# Altium PCB RX_Board.PcbDoc (part 1 of 5)
Units mm, origin at the board's own origin, x right, y up, seen from the top; angles counter-clockwise.
Board outline 69 x 69 mm, 4 copper layers (Top Layer, Int1 (GND), Int2 (GND), Bottom Layer), stack 1.586 mm thick; 118 components, 59 nets, 325 pads, 477 vias.
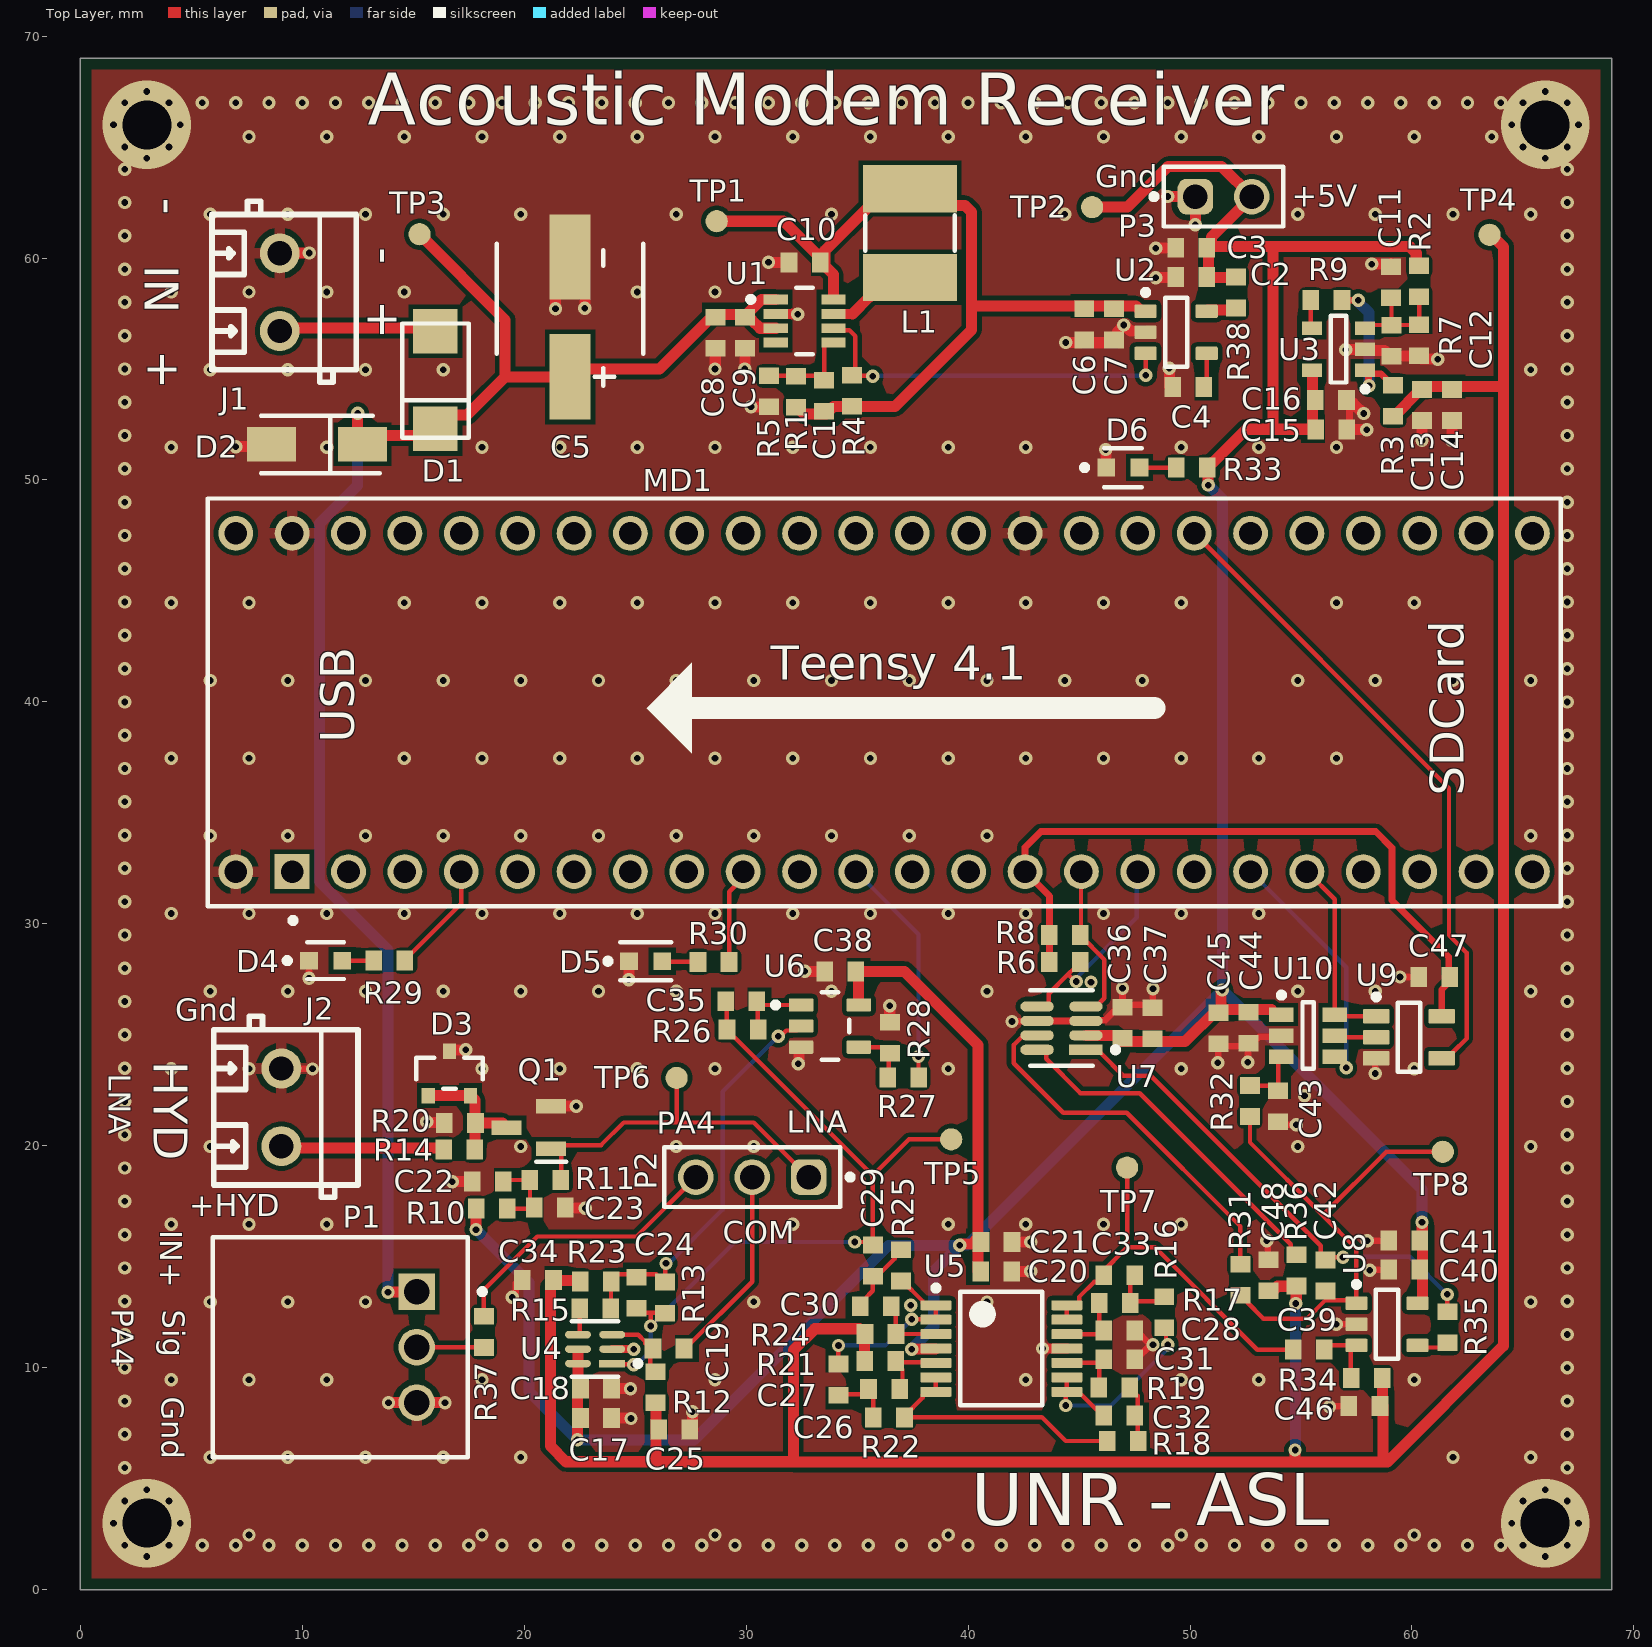
[diagram p0: Top Layer view]
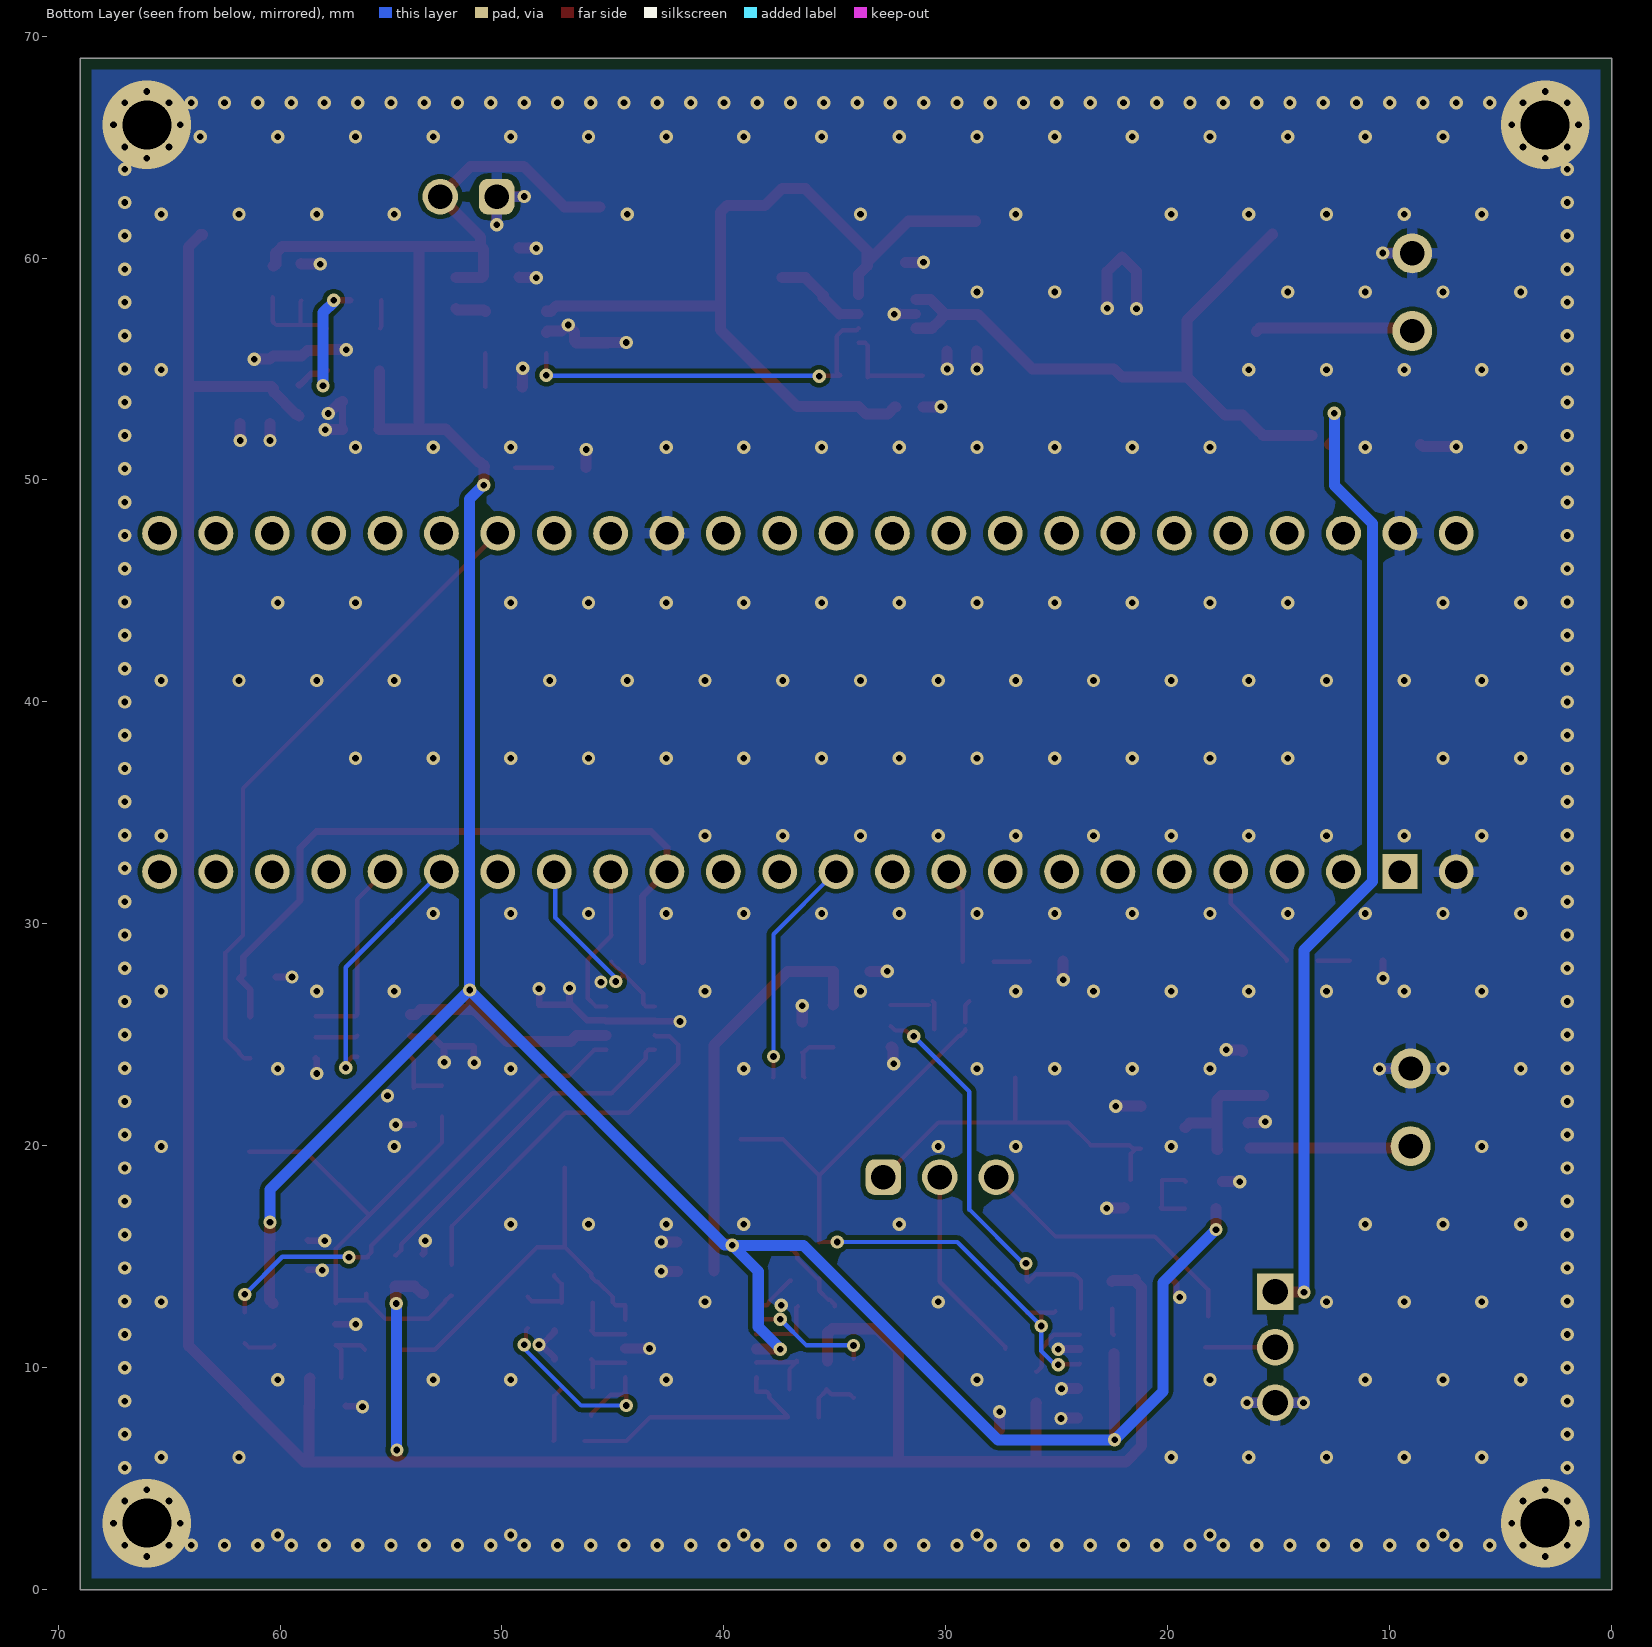
[diagram p1: Bottom Layer view, seen from below]
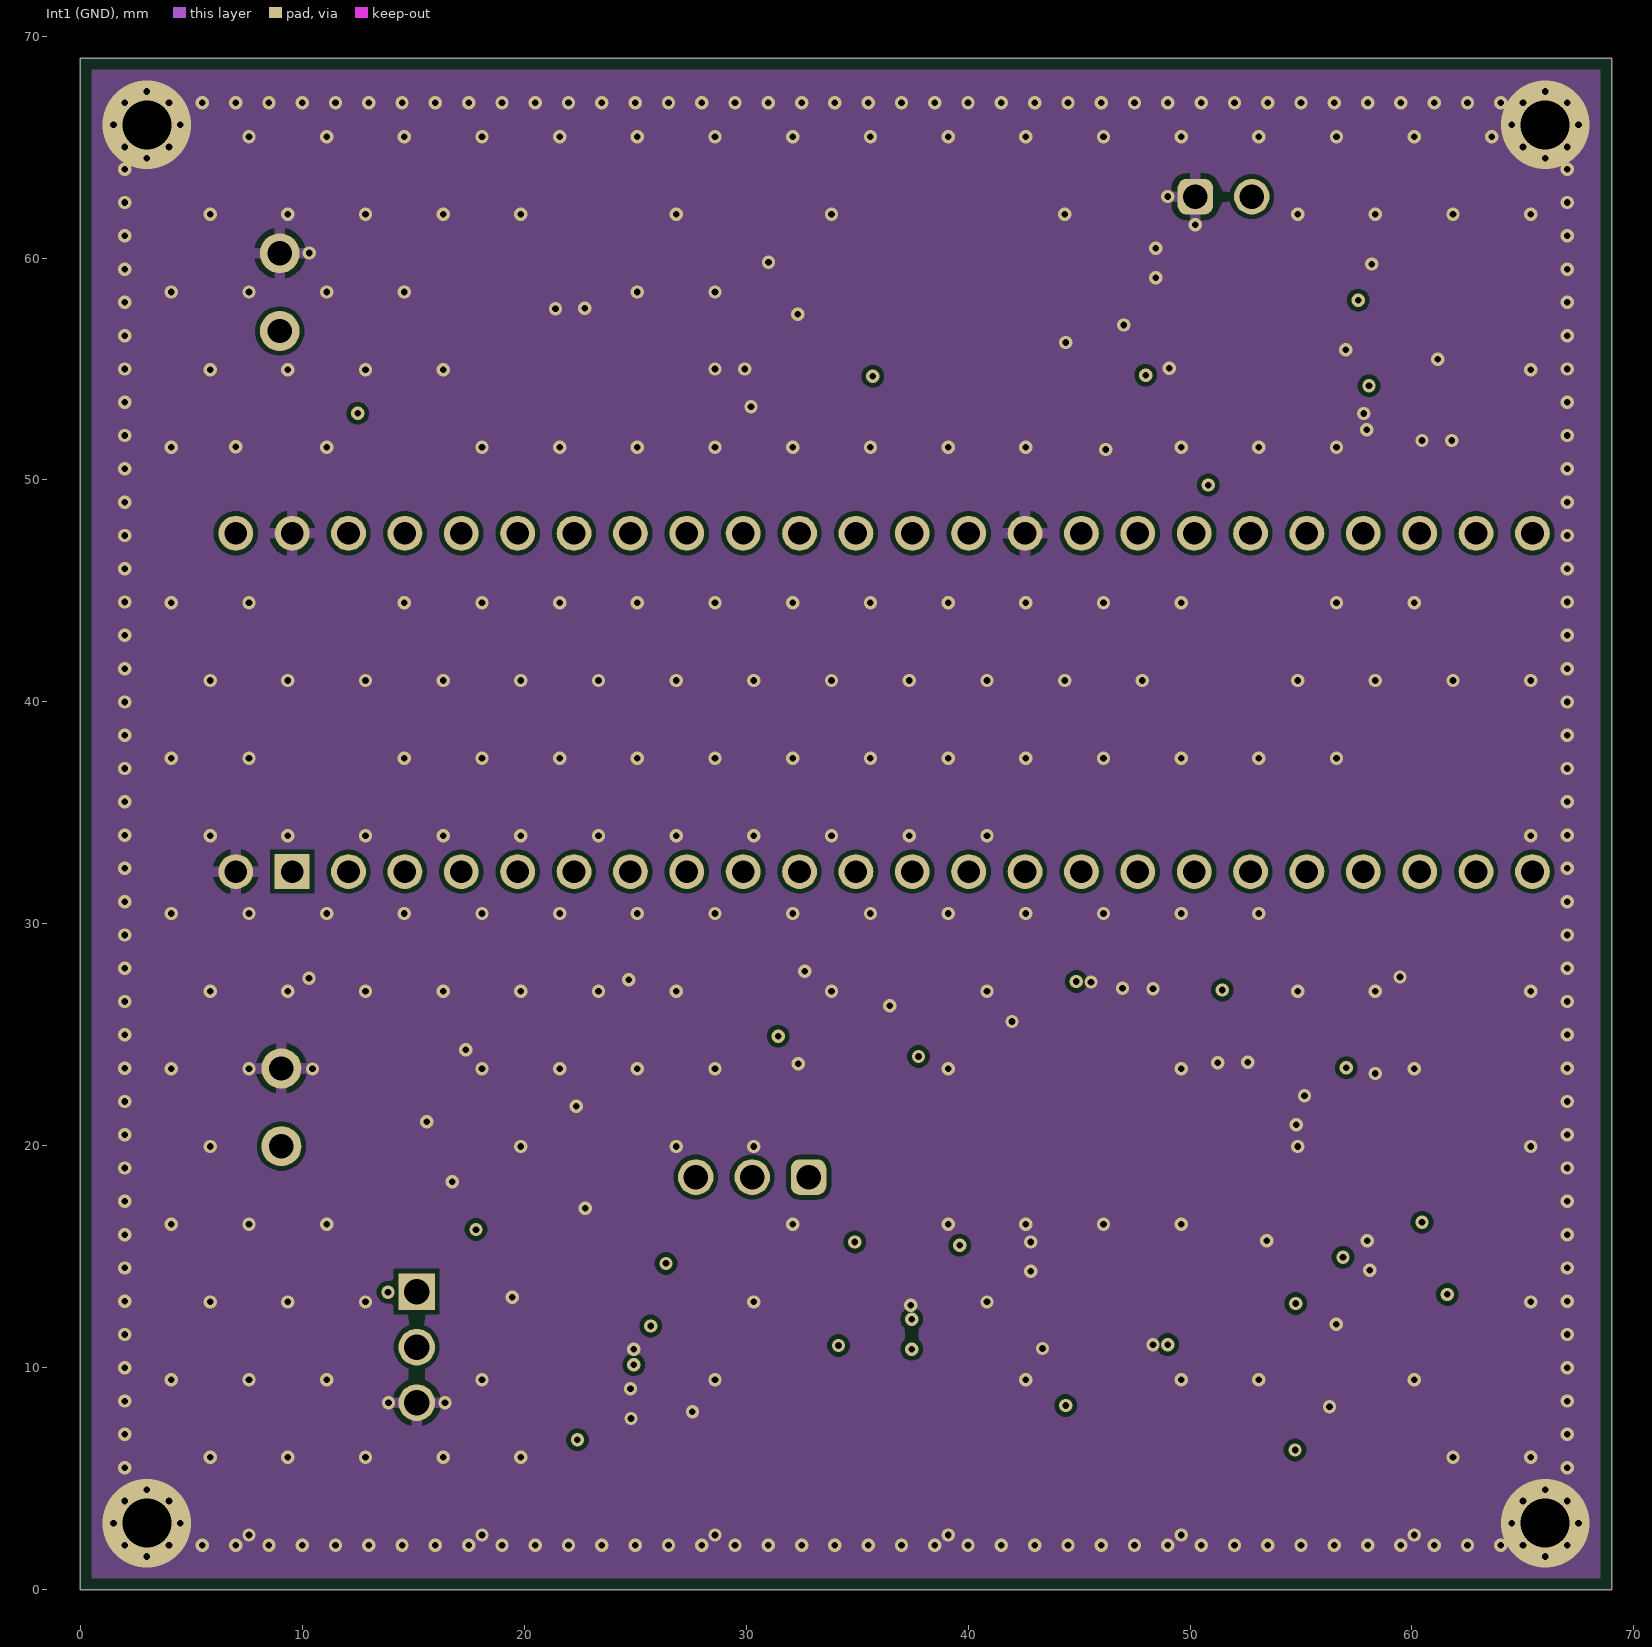
[diagram p2: Int1 (GND)]
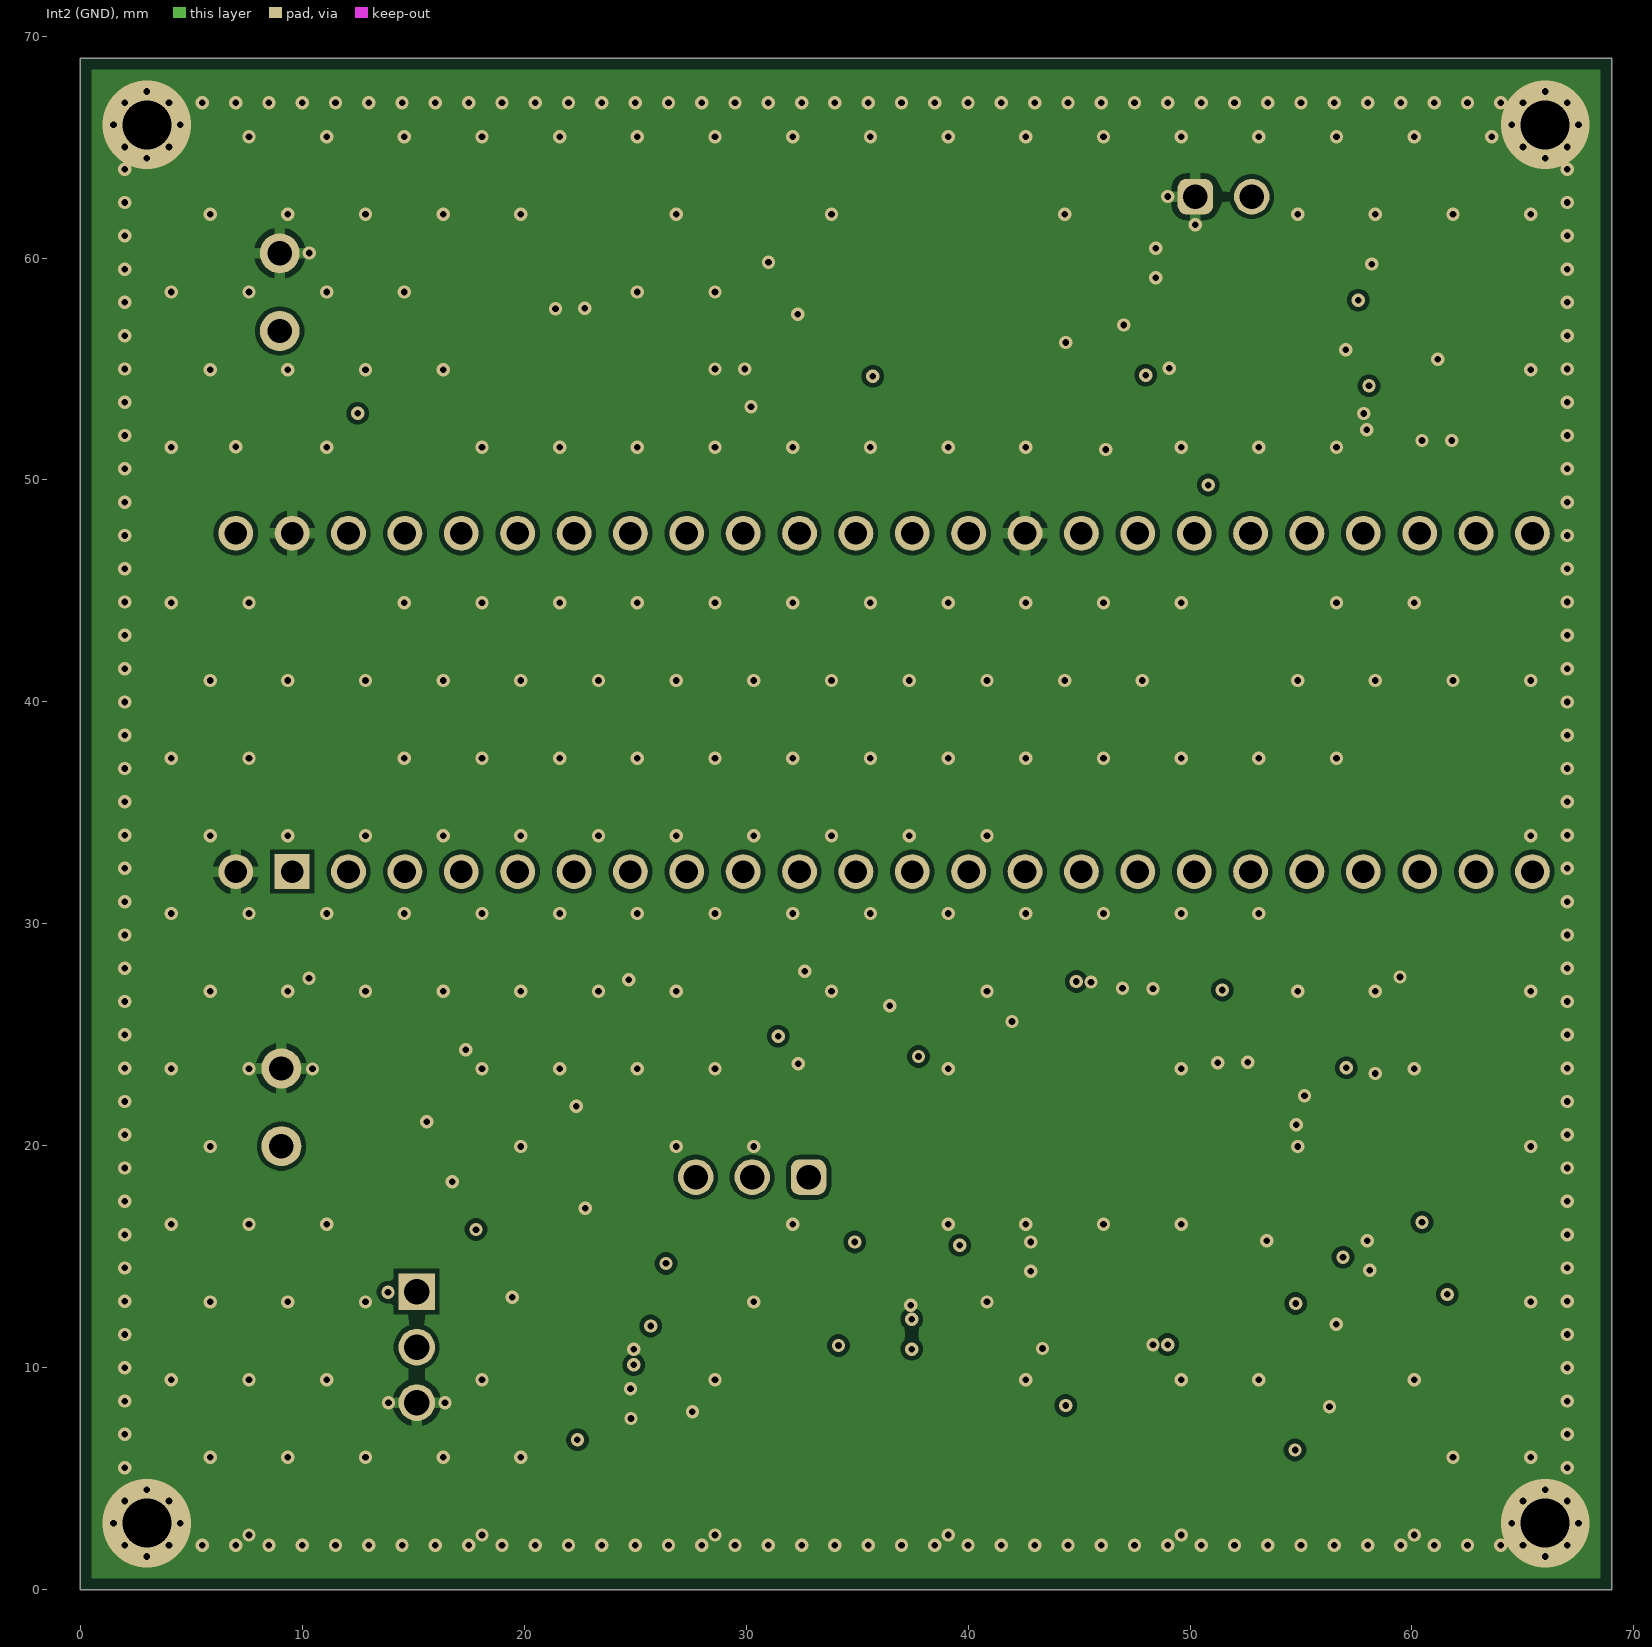
[diagram p3: Int2 (GND)]
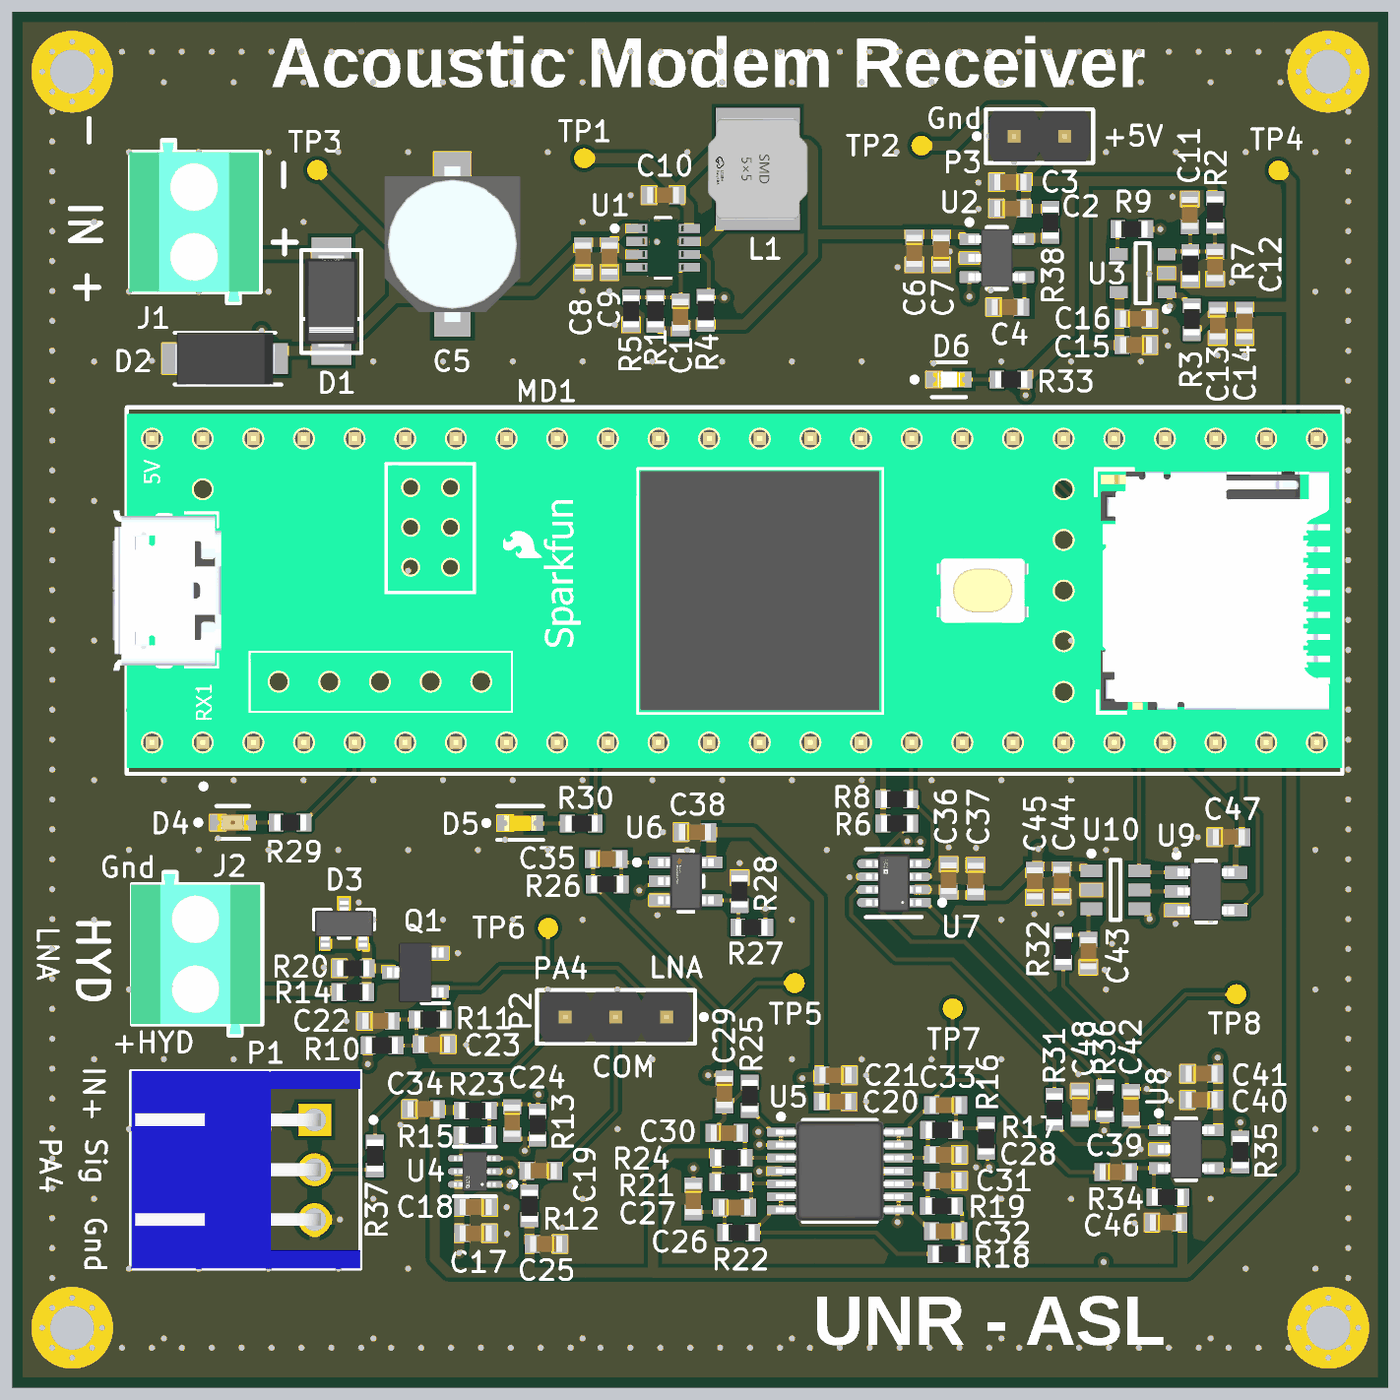
[diagram p5: 3D render of the assembled board from above, using the file's embedded part models]

## Layer stack, top to bottom
Top Solder: solder mask 0.0254, SM-001, Dk 4
Top Layer: signal copper 0.035
Dielectric 1: prepreg 0.2104, PP-017, Dk 4.4
Int1 (GND): signal copper 0.0152
Dielectric 3: core 1.065, Core-039, Dk 4.6
Int2 (GND): signal copper 0.0152
Dielectric 5: prepreg 0.2104, PP-017, Dk 4.4
Bottom Layer: signal copper 0.035
Bottom Solder: solder mask 0.0254, SM-001, Dk 4

## Board outline
0,0 0,69 69,69 69,0

## Design rules (kind name [scope] priority, off if disabled: settings)
BoardOutlineClearance [All] p1: gap=0.5 ignorepadtopadclearanceinfootprint=FALSE
Clearance [All] p1: gap=0.2 ignorepadtopadclearanceinfootprint=FALSE
MinimumSolderMaskSliver [All] p1: minsoldermaskwidth=0.1
PolygonConnect [All] p1: thpad.connectstyle=Relief thpad.reliefconductorwidth=0.5 thpad.reliefentries=4 thpad.polygonreliefangle="90 Angle" thpad.airgapwidth=0.254 smdpad.connectstyle=Direct smdpad.reliefconductorwidth=0.254 smdpad.reliefentries=4 smdpad.polygonreliefangle="90 Angle" smdpad.airgapwidth=0.254 via.connectstyle=Direct via.reliefconductorwidth=0.254 via.reliefentries=4 via.polygonreliefangle="90 Angle" via.airgapwidth=0.254
RoutingVias [All] p1: holewidth=0.3 width=0.6 viastyle="Through Hole" minholewidth=0.3 minwidth=0.6 maxholewidth=0.3 maxwidth=0.6
SilkToSilkClearance [All] p1: silktosilkclearance=0.15
SilkToSolderMaskClearance [IsPad] p1: minsilkscreentomaskgap=0.15 clearancetoexposedcopper=TRUE
SolderMaskExpansion SolderMaskExpansion_Vias [IsVia] p1: expansion=0.102 istentingtop=TRUE
SolderMaskExpansion SolderMaskExpansion_THT [IsPad And IsThruPin] p2: expansion=0.1 istentingtop=FALSE
SolderMaskExpansion [All] p3: expansion=0.05 istentingtop=FALSE
SupplyNets "Schematic Supply Nets_6" [InNet('2V5')] p1: voltage=0.000
SupplyNets "Schematic Supply Nets_5" [InNet('GND')] p2: voltage=0.000
SupplyNets "Schematic Supply Nets_4" [InNet('VIN')] p3: voltage=0.000
SupplyNets "Schematic Supply Nets_3" [InNet('5V')] p4: voltage=0.000
SupplyNets "Schematic Supply Nets_2" [InNet('Teensy_3V3')] p5: voltage=0.000
SupplyNets "Schematic Supply Nets_1" [InNet('5V25')] p6: voltage=0.000
Width Width_PWR_MAIN [InNetClass('PWR_MAIN')] p1: maxlimit=0.8 minlimit=0.5 preferedwidth=0.5
Width Width_PWR_LV [InNetClass('PWR_LV')] p2: maxlimit=0.5 minlimit=0.5 preferedwidth=0.5
Width Width_GND [InNet('GND')] p3: maxlimit=0.8 minlimit=0.5 preferedwidth=0.5
Width [All] p4: maxlimit=0.2 minlimit=0.15 preferedwidth=0.2
27 further rules are at their usual default settings.

## Classes and differential pairs
net class PWR_LV: 2V5 2V5_OUT 5V 5V25 5V_LDO G Teensy_3V3
net class PWR_MAIN: Buck_SW VIN VIN_Supply

## Components (designator, comment, footprint, x,y, rotation, side; value= is the part's Value field where it differs from the comment)
C1 "15pF" CAP_0603 33.517,53.8 r270 top
C2 "100nF" CAP_0603 50.06,59.142 r0 top
C3 "10uF" CAP_0603 50.06,60.463 r180 top value=10µF
C4 "10nF" CAP_0603 49.918,54.189 r0 top
C5 "100uF 25V" CAPAE660X800N 22.069,57.345 r90 top value=100uF
C6 "10uF" CAP_0603 45.234,57.008 r270 top value=10µF
C7 "100nF" CAP_0603 46.58,57.008 r90 top
C8 "10uF" CAP_0603 28.622,56.627 r90 top value=10µF
C9 "100nF" CAP_0603 29.943,56.627 r90 top
C10 "4.7µF" CAP_0603 32.635,59.802 r0 top
C11 "10uF" CAP_0603 59.051,58.913 r270 top value=10µF
C12 "100nF" CAP_0603 60.321,56.297 r270 top
C13 "100nF" CAP_0603 60.448,53.376 r270 top
C14 "10uF" CAP_0603 61.794,53.376 r90 top value=10µF
C15 "10uF" CAP_0603 56.359,52.284 r180 top value=10µF
C16 "100nF" CAP_0603 56.348,53.605 r0 top
C17 "10uF" CAP_0603 23.237,7.743 r180 top value=10µF
C18 "100nF" CAP_0603 23.237,9.064 r180 top
C19 "6.8nF" CAP_0603 26.503,10.867 r180 top
C20 "100nF" CAP_0603 41.271,14.347 r0 top
C21 "10uF" CAP_0603 41.282,15.668 r180 top value=10µF
C22 "10uF" CAP_0603 18.36,18.386 r0 top value=10µF
C23 "100nF" CAP_0603 21.154,17.217 r180 top
C24 "6.8pF" CAP_0603 25.066,13.382 r270 top
C25 "100nF" CAP_0603 26.768,7.21 r180 top
C26 "1nF" CAP_0603 34.159,9.47 r270 top
C27 "1nF" CAP_0603 36.217,9.039 r0 top
C28 "470pF" CAP_0603 46.808,11.68 r180 top
C29 "1nF" CAP_0603 35.709,14.83 r270 top
C30 "1nF" CAP_0603 35.836,12.772 r0 top
C31 "1nF" CAP_0603 46.808,10.385 r180 top
C32 "1.2nF" CAP_0603 46.808,7.845 r180 top
C33 "3.3nF" CAP_0603 46.808,14.169 r180 top
C34 "100nF" CAP_0603 20.621,13.966 r0 top
C35 "68pF" CAP_0603 29.775,26.514 r0 top
C36 "100nF" CAP_0603 46.961,25.549 r270 top
C37 "10uF" CAP_0603 48.307,25.523 r270 top value=10µF
C38 "100nF" CAP_0603 34.235,27.86 r0 top
C39 "6.8nF" CAP_0603 55.343,10.817 r0 top
C40 "100nF" CAP_0603 59.646,14.423 r180 top
C41 "10uF" CAP_0603 59.646,15.744 r0 top value=10µF
C42 "68pF" CAP_0603 56.105,14.159 r270 top
C43 "3.3nF" CAP_0603 53.971,21.789 r90 top
C44 "100nF" CAP_0603 52.625,25.32 r90 top
C45 "1µF" CAP_0603 51.279,25.295 r90 top
C46 "100nF" CAP_0603 57.857,8.277 r0 top
C47 "100nF" CAP_0603 61.007,27.606 r0 top
C48 "100nF" CAP_0603 53.539,14.169 r270 top
D1 "SS34" SS34 16,54.5 r270 top
D2 "SMAJ15A" DIOM5026X229N 10.664,51.605 r180 top
D3 "BAV99,215" FP-SOT23-MFG 16.633,23.263 r90 top
D4 "LTST-C190KRKT" FP-LTST-C190KRKT-MFG 11.057,28.343 r0 top
D5 "LTST-C190KFKT" FP-LTST-C190KFKT-MFG 25.472,28.317 r0 top
D6 "LTST-C190KGKT" FP-LTST-C190KGKT-MFG 46.973,50.557 r0 top
J1 "DB301V-3.5-2P-GN-S" DB301V-3.5-2P-GN-S 8.988,60.21 r270 top
J2 "DB301V-3.5-2P-GN-S" DB301V-3.5-2P-GN-S 9.064,23.486 r270 top
L1 "22µH" SWPA5040S100MT 37.385,61.123 r90 top
MD1 "DEV-16996" FP-DEV-16996-MFG 36.217,39.976 r0 top locked
P1 "S3B-XH-A(LF)(SN)" JST-S3B-XH-A(LF)(SN)_V 15.16,10.929 r270 top
P2 "61300311121" 61300311121 30.273,18.589 r180 top
P3 "61300211121" 61300211121 51.511,62.763 r0 top
Q1 "LSK170A" SOT96P237X122-3N 20.215,20.824 r180 top
R1 "560kΩ" RES_0603 32.254,53.986 r270 top
R2 "10kΩ" RES_0603 60.321,58.939 r90 top
R3 "10Ω" RES_0603 59.153,53.579 r270 top
R4 "100kΩ" RES_0603 34.769,54.011 r90 top
R5 "100kΩ" RES_0603 31.035,53.986 r90 top
R6 "4.7kΩ" RES_0603 44.37,28.292 r180 top
R7 "10kΩ" RES_0603 59.077,56.283 r270 top
R8 "4.7kΩ" RES_0603 44.37,29.511 r180 top
R9 "4.7kΩ" RES_0603 56.13,58.1 r0 top
R10 "22Ω" RES_0603 18.527,17.167 r0 top
R11 "510Ω" RES_0603 20.962,18.462 r180 top
R12 "10kΩ" RES_0603 25.93,9.115 r90 top
R13 "47kΩ" RES_0603 26.336,13.179 r270 top
R14 "100Ω" RES_0603 17.065,19.834 r0 top
R15 "9.1kΩ" RES_0603 23.212,12.671 r180 top
R16 "1.5kΩ" RES_0603 48.84,12.493 r90 top
R17 "1.5kΩ" RES_0603 46.616,12.925 r180 top
R18 "1.5kΩ" RES_0603 46.961,6.702 r0 top
R19 "1.5kΩ" RES_0603 46.605,9.115 r180 top
R20 "100kΩ" RES_0603 17.09,21.027 r0 top
R21 "20kΩ" RES_0603 36.028,10.309 r0 top
R22 "3kΩ" RES_0603 36.42,7.769 r0 top
R23 "820Ω" RES_0603 23.212,13.89 r0 top
R24 "8.2kΩ" RES_0603 36.039,11.528 r0 top
R25 "7.5kΩ" RES_0603 36.979,14.627 r270 top
R26 "5.6kΩ" RES_0603 29.827,25.244 r0 top
R27 "3.3kΩ" RES_0603 37.069,23.085 r0 top
R28 "100kΩ" RES_0603 36.471,24.888 r270 top
R29 "1kΩ" RES_0603 13.941,28.343 r180 top
R30 "1kΩ" RES_0603 28.546,28.292 r180 top
R31 "4.7kΩ" RES_0603 52.269,13.952 r90 top
R32 "100Ω" RES_0603 52.701,22.007 r90 top
R33 "2.4kΩ" RES_0603 50.096,50.557 r180 top
R34 "10kΩ" RES_0603 57.945,9.547 r0 top
R35 "10kΩ" RES_0603 61.591,11.807 r90 top
R36 "82Ω" RES_0603 54.809,14.373 r90 top
R37 "330Ω" RES_0603 18.183,11.629 r270 top
R38 "0Ω" RES_0603 52.066,58.431 r90 top
TP1 "Test Point" "Test Point" 28.673,61.656 r90 top
TP2 "Test Point" "Test Point" 45.589,62.291 r90 top
TP3 "Test Point" "Test Point" 15.287,61.072 r90 top
TP4 "Test Point" "Test Point" 63.496,61.047 r90 top
TP5 "Test Point" "Test Point" 39.239,20.291 r90 top
TP6 "Test Point" "Test Point" 26.869,23.059 r90 top
TP7 "Test Point" "Test Point" 47.164,19.021 r90 top
TP8 "Test Point" "Test Point" 61.388,19.732 r90 top
U1 "TPS62120DCNR" FP-DCN0008A-MFG 32.635,57.161 r0 top
U2 "TPS73150DBVR" DBV0005A_N 49.374,56.653 r0 top
U3 "AD8031ARTZ-REEL7" ADI-RJ-5_L 56.689,55.891 r180 top
U4 "ADA4807-1AKSZ-R2" FP-KS-6-IPC_C 23.194,10.842 r180 top
U5 "OPA4322AIPWR" PW0014A_N 41.5,10.867 r0 top
U6 "TS5A3166DBVR" FP-DBV0005A-MFG 33.778,25.396 r0 top
U7 "AD5245BRJZ10-RL7" FP-RJ-8-IPC_B 44.209,25.303 r180 top
U8 "OPA365AIDBVR" DBV0005A_N 58.873,11.96 r0 top
U9 "SN74LVC1G125DBVR" DBV0005A_M 59.864,24.888 r0 top
U10 "ADC121S101CIMF/NOPB" MF06A_N 55.317,24.964 r0 top

## Footprints (in the part's own frame and the unit in brackets; to place one, negate y for a bottom-side part, rotate by r counter-clockwise, add the part's x,y. Pads: shape width x height; smd on the part's side, far side on the other; paste and mask are expansions set on the pad)
61300211121 [mm] "Pin Header, pitch 2.54 mm, THT, Vertical, single row, 2p"
  rrect50% 1.6x1.6 hole 1.1: 1(-1.27,0)
  round 1.6 hole 1.1: 2(1.27,0)
  silkscreen extent -3.26,-1.35 2.69,1.35, body extent -2.54,-1.27 2.54,1.27, height 8.57
61300311121 [mm] "Pin Header, pitch 2.54 mm, THT, Vertical, single row, 3p"
  rrect50% 1.6x1.6 hole 1.1: 1(-2.54,0)
  round 1.6 hole 1.1: 2(0,0) 3(2.54,0)
  silkscreen extent -4.53,-1.35 3.96,1.35, body extent -3.81,-1.27 3.81,1.27, height 8.57
ADI-RJ-5_L [mm] "SOT-23, 5-Leads, Body 2.9x1.6mm, Pitch 0.95mm, IPC High Density"
  rect 0.9x0.6 smd: 1(-1.2,0.95) 2(-1.2,0) 3(-1.2,-0.95) 4(1.2,-0.95) 5(1.2,0.95)
  silkscreen extent -1.33,-1.5 0.35,1.92, body extent -0.85,-1.5 0.85,1.5, height 1.45
CAP_0603 [mm]
  rect 0.75x0.9 smd: 1(-0.7,0) 2(0.7,0)
  body extent -0.8,-0.4 0.8,0.4, height 0.9
CAPAE660X800N [mm]
  rect 3.85x1.85 smd: 1(-2.7,0) 2(2.7,0)
  silkscreen extent -3.1,-3.3 3.3,3.3, body extent -3.9,-3.4 3.9,3.4, height 8
DB301V-3.5-2P-GN-S [mm]
  round 1.8 hole 1.1: 1(0,0) 2(3.5,0)
  silkscreen extent -2.35,-3.05 5.8,3.45, body extent -2.25,-3.13 5.75,3.38, height 8.5
DBV0005A_M [mm] "SOT23, 5-Leads, Body 3.05x1.75mm, Pitch 0.95mm, IPC Low Density"
  rrect15% 1.2x0.65 smd: 1(-1.475,0.95) 2(-1.475,0) 3(-1.475,-0.95) 4(1.475,-0.95) 5(1.475,0.95)
  silkscreen extent -1.6,-1.55 0.5,1.95, body extent -1.42,-1.46 1.42,1.46, height 1.08
DBV0005A_N [mm] "SOT23, 5-Leads, Body 3.05x1.75mm, Pitch 0.95mm, IPC Medium Density"
  rrect17% 1x0.6 smd: 1(-1.375,0.95) 2(-1.375,0) 3(-1.375,-0.95) 4(1.375,-0.95) 5(1.375,0.95)
  silkscreen extent -1.5,-1.55 0.5,1.92, body extent -1.42,-1.46 1.42,1.46, height 1.08
DIOM5026X229N [mm]
  rect 2.2x1.55 smd: 1(-2.05,0) 2(2.05,0)
  silkscreen extent -2.83,-1.3 2.52,1.3, body extent -2.52,-1.3 2.52,1.3, height 2.29
FP-DBV0005A-MFG [mm]
  rrect17% 1.1x0.6 smd paste+0: 1(-1.3,0.95) 2(-1.3,0) 3(-1.3,-0.95) 4(1.3,-0.95) 5(1.3,0.95)
  silkscreen extent -2.57,-1.53 0.87,1.53, body extent -1.95,-1.78 1.95,1.78, height 0.25
FP-DCN0008A-MFG [mm]
  rect 1.1x0.45 smd paste+0: 1(-1.3,0.975) 2(-1.3,0.325) 3(-1.3,-0.325) 4(-1.3,-0.975) 5(1.3,-0.975) 6(1.3,-0.325) 7(1.3,0.325) 8(1.3,0.975)
  silkscreen extent -2.55,-1.5 0.38,1.5, body extent -1.95,-1.85 1.95,1.85, height 0.25
FP-DEV-16996-MFG [mm]
  rect 1.57x1.57 hole 1.02 paste-2539.97: 0(-26.67,-7.62)
  round 1.57 hole 1.02 paste-2539.97: 1(-24.13,-7.62) 2(-21.59,-7.62) 3(-19.05,-7.62) 4(-16.51,-7.62) 5(-13.97,-7.62) 6(-11.43,-7.62) 7(-8.89,-7.62) 8(-6.35,-7.62) 9(-3.81,-7.62) 10(-1.27,-7.62) 11(1.27,-7.62) 12(3.81,-7.62) 13(3.81,7.62) 14(1.27,7.62) 15(-1.27,7.62) 16(-3.81,7.62) 17(-6.35,7.62) 18(-8.89,7.62) 19(-11.43,7.62) 20(-13.97,7.62) 21(-16.51,7.62) 22(-19.05,7.62) 23(-21.59,7.62) 24(8.89,-7.62) 25(11.43,-7.62) 26(13.97,-7.62) 27(16.51,-7.62) 28(19.05,-7.62) 29(21.59,-7.62) 30(24.13,-7.62) 31(26.67,-7.62) 32(29.21,-7.62) 33(29.21,7.62) 34(26.67,7.62) 35(24.13,7.62) 36(21.59,7.62) 37(19.05,7.62) 38(16.51,7.62) 39(13.97,7.62) 40(11.43,7.62) 41(8.89,7.62) 42(-29.21,7.62) 43(-26.67,7.62) 44(-24.13,7.62) 45(6.35,7.62) 46(-29.21,-7.62) 47(6.35,-7.62)
  silkscreen extent -30.48,-9.94 30.48,9.19, body extent -30.58,-9.29 30.58,9.29, height 0.25
FP-KS-6-IPC_C [mm]
  rect 1.164x0.336 smd paste+0: 1(-0.77,0.65)
  rrect100% 1.164x0.336 smd paste+0: 2(-0.77,0) 3(-0.77,-0.65) 4(0.77,-0.65) 5(0.77,0) 6(0.77,0.65)
  silkscreen extent -2.05,-1.25 1.05,1.25, body extent -1.45,-1.1 1.45,1.1, height 0.25
FP-LTST-C190KFKT-MFG [mm]
  rect 0.8x0.8 smd paste+0: 1(-0.75,0) 2(0.75,0)
  silkscreen extent -1.82,-0.85 1.15,0.85, body extent -1.25,-0.55 1.25,0.55, height 0.25
FP-LTST-C190KGKT-MFG [mm]
  rect 0.8x0.8 smd paste+0: 1(-0.75,0) 2(0.75,0)
  silkscreen extent -1.85,-0.87 0.85,0.87, body extent -1.25,-0.55 1.25,0.55, height 0.25
FP-LTST-C190KRKT-MFG [mm]
  rect 0.8x0.8 smd paste+0: 1(-0.75,0) 2(0.75,0)
  silkscreen extent -1.85,-0.82 0.82,0.82, body extent -1.25,-0.55 1.25,0.55, height 0.25
FP-RJ-8-IPC_B [mm]
  rect 1.505x0.455 smd paste+0: 1(-1.1,0.975)
  rrect100% 1.505x0.455 smd paste+0: 2(-1.1,0.325) 3(-1.1,-0.325) 4(-1.1,-0.975) 5(1.1,-0.975) 6(1.1,-0.325) 7(1.1,0.325) 8(1.1,0.975)
  silkscreen extent -2.55,-1.7 1.4,1.7, body extent -2.1,-1.7 2.1,1.7, height 0.25
FP-SOT23-MFG [mm]
  rect 0.7x0.6 smd paste-1000: 1(-1,0.95) 2(-1,-0.95) 3(1,0)
  silkscreen extent -0.7,-1.5 0.7,1.5, body extent -1.5,-1.65 1.5,1.65, height 0.25
JST-S3B-XH-A(LF)(SN)_V [mm] "Header, 3-Leads, Body 9.9x11.5mm, Pitch 2.5mm"
  rect 1.65x1.65 hole 1.15: 1(-2.5,0)
  round 1.65 hole 1.15: 2(0,0) 3(2.5,0)
  silkscreen extent -4.95,-9.2 4.95,3.08, body extent -4.95,-9.2 4.95,2.3, height 6.15
MF06A_N [mm] "SOT23, 6-Leads, Body 2.9x1.6mm, Pitch 0.95mm, Lead Span 2.8mm, IPC Medium Density"
  rect 1.1x0.65 smd: 1(-1.2,0.95) 2(-1.2,0) 3(-1.2,-0.95) 4(1.2,-0.95) 5(1.2,0) 6(1.2,0.95)
  silkscreen extent -1.32,-1.5 0.25,1.95, body extent -0.83,-1.49 0.83,1.5, height 1.22
PW0014A_N [mm] "SOP, 14-Leads, Body 5.1x4.5mm, Pitch 0.65mm, IPC Medium Density"
  rrect22% 1.4x0.45 smd: 1(-2.95,1.95) 2(-2.95,1.3) 3(-2.95,0.65) 4(-2.95,0) 5(-2.95,-0.65) 6(-2.95,-1.3) 7(-2.95,-1.95) 8(2.95,-1.95) 9(2.95,-1.3) 10(2.95,-0.65) 11(2.95,0) 12(2.95,0.65) 13(2.95,1.3) 14(2.95,1.95)
  silkscreen extent -3.07,-2.55 1.85,2.85, body extent -3.21,-2.5 3.21,2.5, height 1
RES_0603 [mm]
  rect 0.75x0.9 smd: 1(-0.686,0.002) 2(0.714,0.002)
  body extent -0.8,-0.4 0.8,0.4, height 0.45
SOT96P237X122-3N [mm]
  rect 1.35x0.65 smd: 1(-1,0.96) 2(-1,-0.96) 3(1,0)
  silkscreen extent -1.68,1.54 -0.33,1.54, body extent -1.42,-1.5 1.42,1.5, height 1.2
SS34 [mm]
  rect 2x2 smd: A(-2.2,0) K(2.2,0)
  silkscreen extent -2.55,-1.5 2.6,1.5, body extent -2.34,-1.3 2.36,1.3, height 2
SWPA5040S100MT [mm] "Chip Inductor, 2-Leads, Body 5.00x5.00mm, IPC Medium Density"
  rect 2.124x4.22 smd: 1(-2,0) 2(2,0)
  silkscreen extent -0.8,-2.01 0.8,2.01, body extent -2.51,-2.5 2.51,2.5, height 2.13
"Test Point" [mm]
  round 1 smd paste-2539.97: 1(0,0)

## Part data
C1: library part CL10C150JB8NNNC, "Multilayer Ceramic Capacitor, 15 pF, 50 V, ± 5%, C0G (NP0), 0603 [1608 Metric]", Case Code (Imperial)=0603, Case Code (Metric)=1608, Dielectric=C0G, Dielectric Material=Ceramic, JLCPCB Part Number=C1644, Manufacturer="Samsung Electro-Mechanics", Max Operating Temperature=125°C, Min Operating Temperature=-55°C, Temperature Coefficient=30ppm/°C, Tolerance=5%, Voltage=50V, Case/Package=0603, Category="Ceramic Capacitors", China RoHS=Compliant, ComponentLink1Description=https://datasheet.octopart.com:443/CL10C150JB8NNNC-Samsung-Electro-Mechanics-datasheet-136482401.pdf?src-supplier=IHS, ComponentLink1URL=https://datasheet.octopart.com:443/CL10C150JB8NNNC-Samsung-Electro-Mechanics-datasheet-136482401.pdf?src-supplier=IHS, ComponentLink2Description=https://datasheet.octopart.com/CL10C150JB8NNNC-Samsung-Electro-Mechanics-datasheet-8324245.pdf, ComponentLink2URL=https://datasheet.octopart.com/CL10C150JB8NNNC-Samsung-Electro-Mechanics-datasheet-8324245.pdf, ComponentLink3Description=https://datasheet.octopart.com/CL10C150JB8NNNC-Samsung-Electro-Mechanics-datasheet-97040617.pdf, ComponentLink3URL=https://datasheet.octopart.com/CL10C150JB8NNNC-Samsung-Electro-Mechanics-datasheet-97040617.pdf, ComponentLink4Description=https://datasheet.octopart.com:443/CL10C150JB8NNNC-Samsung-Electro-Mechanics-datasheet-110326846.pdf?src-supplier=Future+Electronics, ComponentLink4URL=https://datasheet.octopart.com:443/CL10C150JB8NNNC-Samsung-Electro-Mechanics-datasheet-110326846.pdf?src-supplier=Future+Electronics, ComponentLink5Description=https://datasheet.octopart.com:443/CL10C150JB8NNNC-Samsung-Electro-Mechanics-datasheet-81461981.pdf?src-supplier=Future+Electronics, ComponentLink5URL=https://datasheet.octopart.com:443/CL10C150JB8NNNC-Samsung-Electro-Mechanics-datasheet-81461981.pdf?src-supplier=Future+Electronics, ComponentLink6Description=https://datasheet.octopart.com:443/CL10C150JB8NNNC-Samsung-datasheet-42280548.pdf?src-supplier=Future+Electronics, ComponentLink6URL=https://datasheet.octopart.com:443/CL10C150JB8NNNC-Samsung-datasheet-42280548.pdf?src-supplier=Future+Electronics, ComponentLink7Description=https://datasheet.octopart.com:443/CL10C150JB8NNNC-Samsung-datasheet-26669126.pdf?src-supplier=Future+Electronics, ComponentLink7URL=https://datasheet.octopart.com:443/CL10C150JB8NNNC-Samsung-datasheet-26669126.pdf?src-supplier=Future+Electronics, ComponentLink8Description=https://datasheet.octopart.com:443/CL10C150JB8NNNC-Samsung-Electro-Mechanics-datasheet-149154145.pdf?src-supplier=Future+Electronics, ComponentLink8URL=https://datasheet.octopart.com:443/CL10C150JB8NNNC-Samsung-Electro-Mechanics-datasheet-149154145.pdf?src-supplier=Future+Electronics, ComponentLink9Description=https://datasheet.octopart.com:443/CL10C150JB8NNNC-Samsung-datasheet-8326407.pdf?src-supplier=TME, ComponentLink9URL=https://datasheet.octopart.com:443/CL10C150JB8NNNC-Samsung-datasheet-8326407.pdf?src-supplier=TME, Contact Plating=Tin, Country of Origin="Mainland China, Philippines, South Korea", Depth=800µm, Export Control Classification Number (ECCN) Code=EAR99, Harmonized Tariff Schedule (HTS) Code=8532.24.00.20, Height=900µm, Introduction Date=2010-02-10, Lead Free="Lead Free", Length=1.6mm, Lifecycle Status=Production, Manufacturer Part Number=CL10C150JB8NNNC, Material=Ceramic, Mounting Technology="Surface Mount", Number of Terminals=2, Pricing="4000=0.0389, 8000=0.0383, 12000=0.0379, 20000=0.0375, 40000=0.0365 (USD)", Radiation Hardening=No, REACH SVHC=Unaffected, RoHS=Compliant, Schedule B="8532240020, 8532240020|8532240020, 8532240020|8532240020|8532240020, 8532240020|8532240020|8532240020|8532240020", Stock=68000, Supplier="Future Electronics", Supplier Part Number=CL10C150JB8NNNC, Thickness=889µm, Voltage Rating=50V, Voltage Rating (DC)=50V, Width=800µm
C2 C7 C9 C12 C13 C16 C18 C20 C23 C25 C34 C36 C38 C40 C44 C46 C47 C48: library part CC0603KRX7R9BB104, "Multilayer Ceramic Capacitor, CC Series, 0.1 - F, - 10%, X7R, 50 V, 0603 [1608 Metric]", Case Code (Imperial)=0603, Case Code (Metric)=1608, Dielectric=X7R, Dielectric Material=Ceramic, JLCPCB Part Number=C14663, Manufacturer="Yageo Group", Max Operating Temperature=125°C, Min Operating Temperature=-55°C, Tolerance=10%, Voltage=50V, Case/Package=0603, Category="Ceramic Capacitors", China RoHS=Compliant, ComponentLink1Description=https://datasheet.octopart.com:443/CC0603KRX7R9BB104-Yageo-datasheet-177165144.pdf?src-supplier=IHS, ComponentLink1URL=https://datasheet.octopart.com:443/CC0603KRX7R9BB104-Yageo-datasheet-177165144.pdf?src-supplier=IHS, ComponentLink2Description=https://datasheet.octopart.com:443/CC0603KRX7R9BB104-Yageo-datasheet-82288757.pdf?src-supplier=Upverter, ComponentLink2URL=https://datasheet.octopart.com:443/CC0603KRX7R9BB104-Yageo-datasheet-82288757.pdf?src-supplier=Upverter, ComponentLink3Description=https://datasheet.octopart.com:443/CC0603KRX7R9BB104-Yageo-datasheet-68298032.pdf?src-supplier=Upverter, ComponentLink3URL=https://datasheet.octopart.com:443/CC0603KRX7R9BB104-Yageo-datasheet-68298032.pdf?src-supplier=Upverter, ComponentLink4Description=https://datasheet.octopart.com:443/CC0603KRX7R9BB104-Yageo-Group-datasheet-189192896.pdf?src-supplier=Future+Electronics, ComponentLink4URL=https://datasheet.octopart.com:443/CC0603KRX7R9BB104-Yageo-Group-datasheet-189192896.pdf?src-supplier=Future+Electronics, ComponentLink5Description=https://datasheet.octopart.com:443/CC0603KRX7R9BB104-Yageo-datasheet-12526321.pdf?src-supplier=Future+Electronics, ComponentLink5URL=https://datasheet.octopart.com:443/CC0603KRX7R9BB104-Yageo-datasheet-12526321.pdf?src-supplier=Future+Electronics, ComponentLink6Description=https://datasheet.octopart.com:443/CC0603KRX7R9BB104-Yageo-datasheet-166511530.pdf?src-supplier=Future+Electronics, ComponentLink6URL=https://datasheet.octopart.com:443/CC0603KRX7R9BB104-Yageo-datasheet-166511530.pdf?src-supplier=Future+Electronics, ComponentLink7Description=https://datasheet.octopart.com:443/CC0603KRX7R9BB104-Yageo-datasheet-137700082.pdf?src-supplier=Future+Electronics, ComponentLink7URL=https://datasheet.octopart.com:443/CC0603KRX7R9BB104-Yageo-datasheet-137700082.pdf?src-supplier=Future+Electronics, ComponentLink8Description=https://datasheet.octopart.com:443/CC0603KRX7R9BB104-Yageo-datasheet-137700084.pdf?src-supplier=Future+Electronics, ComponentLink8URL=https://datasheet.octopart.com:443/CC0603KRX7R9BB104-Yageo-datasheet-137700084.pdf?src-supplier=Future+Electronics, ComponentLink9Description=https://datasheet.octopart.com:443/CC0603KRX7R9BB104-Yageo-datasheet-27626582.pdf?src-supplier=Future+Electronics, ComponentLink9URL=https://datasheet.octopart.com:443/CC0603KRX7R9BB104-Yageo-datasheet-27626582.pdf?src-supplier=Future+Electronics, ComponentLink10Description=https://datasheet.octopart.com:443/CC0603KRX7R9BB104-Yageo-datasheet-15895757.pdf?src-supplier=Future+Electronics, ComponentLink10URL=https://datasheet.octopart.com:443/CC0603KRX7R9BB104-Yageo-datasheet-15895757.pdf?src-supplier=Future+Electronics, ComponentLink11Description=https://datasheet.octopart.com:443/CC0603KRX7R9BB104-Yageo-datasheet-8324192.pdf?src-supplier=Future+Electronics, ComponentLink11URL=https://datasheet.octopart.com:443/CC0603KRX7R9BB104-Yageo-datasheet-8324192.pdf?src-supplier=Future+Electronics, ComponentLink12Description=https://datasheet.octopart.com/CC0603KRX7R9BB104-Yageo-datasheet-10883670.pdf, ComponentLink12URL=https://datasheet.octopart.com/CC0603KRX7R9BB104-Yageo-datasheet-10883670.pdf, ComponentLink13Description=https://datasheet.octopart.com:443/CC0603KRX7R9BB104-Yageo-datasheet-181968726.pdf?src-supplier=Newark, ComponentLink13URL=https://datasheet.octopart.com:443/CC0603KRX7R9BB104-Yageo-datasheet-181968726.pdf?src-supplier=Newark, ComponentLink14Description=https://datasheet.octopart.com:443/CC0603KRX7R9BB104-Yageo-datasheet-499490.pdf?src-supplier=Newark, ComponentLink14URL=https://datasheet.octopart.com:443/CC0603KRX7R9BB104-Yageo-datasheet-499490.pdf?src-supplier=Newark, ComponentLink15Description=https://datasheet.octopart.com:443/CC0603KRX7R9BB104-Yageo-datasheet-62336348.pdf?src-supplier=Newark, ComponentLink15URL=https://datasheet.octopart.com:443/CC0603KRX7R9BB104-Yageo-datasheet-62336348.pdf?src-supplier=Newark, ComponentLink16Description=https://datasheet.octopart.com:443/CC0603KRX7R9BB104-Yageo-datasheet-147453679.pdf?src-supplier=Newark, ComponentLink16URL=https://datasheet.octopart.com:443/CC0603KRX7R9BB104-Yageo-datasheet-147453679.pdf?src-supplier=Newark, ComponentLink17Description=https://datasheet.octopart.com:443/CC0603KRX7R9BB104-Yageo-datasheet-151948686.pdf?src-supplier=Farnell, ComponentLink17URL=https://datasheet.octopart.com:443/CC0603KRX7R9BB104-Yageo-datasheet-151948686.pdf?src-supplier=Farnell, ComponentLink18Description=https://datasheet.octopart.com:443/CC0603KRX7R9BB104-Yageo-datasheet-500777.pdf?src-supplier=Farnell, ComponentLink18URL=https://datasheet.octopart.com:443/CC0603KRX7R9BB104-Yageo-datasheet-500777.pdf?src-supplier=Farnell, ComponentLink19Description=https://datasheet.octopart.com:443/CC0603KRX7R9BB104-Yageo-datasheet-178019014.pdf?src-supplier=Burklin+Elektronik, ComponentLink19URL=https://datasheet.octopart.com:443/CC0603KRX7R9BB104-Yageo-datasheet-178019014.pdf?src-supplier=Burklin+Elektronik, ComponentLink20Description=https://datasheet.octopart.com:443/CC0603KRX7R9BB104-Yageo-Group-datasheet-165992755.pdf?src-supplier=ODG+(Origin+Data+Global), ComponentLink20URL=https://datasheet.octopart.com:443/CC0603KRX7R9BB104-Yageo-Group-datasheet-165992755.pdf?src-supplier=ODG+(Origin+Data+Global), ComponentLink21Description=https://datasheet.octopart.com:443/CC0603KRX7R9BB104-Yageo-datasheet-140260305.pdf?src-supplier=SOS+electronic, ComponentLink21URL=https://datasheet.octopart.com:443/CC0603KRX7R9BB104-Yageo-datasheet-140260305.pdf?src-supplier=SOS+electronic, ComponentLink22Description=https://datasheet.octopart.com:443/CC0603KRX7R9BB104-Yageo-datasheet-120101875.pdf?src-supplier=Megastar, ComponentLink22URL=https://datasheet.octopart.com:443/CC0603KRX7R9BB104-Yageo-datasheet-120101875.pdf?src-supplier=Megastar, ComponentLink23Description=https://datasheet.octopart.com:443/CC0603KRX7R9BB104-Yageo-datasheet-8701427.pdf?src-supplier=element14, ComponentLink23URL=https://datasheet.octopart.com:443/CC0603KRX7R9BB104-Yageo-datasheet-8701427.pdf?src-supplier=element14, ComponentLink24Description=https://datasheet.octopart.com:443/CC0603KRX7R9BB104-Yageo-datasheet-5301394.pdf?src-supplier=element14, ComponentLink24URL=https://datasheet.octopart.com:443/CC0603KRX7R9BB104-Yageo-datasheet-5301394.pdf?src-supplier=element14, ComponentLink25Description=https://datasheet.octopart.com:443/CC0603KRX7R9BB104-Yageo-datasheet-17600895.pdf?src-supplier=TME, ComponentLink25URL=https://datasheet.octopart.com:443/CC0603KRX7R9BB104-Yageo-datasheet-17600895.pdf?src-supplier=TME, ComponentLink26Description=http://sigma.octopart.com:80/15889575/rohs_statement/Yageo-CC0603KRX7R9BB104.pdf?src-supplier=Compliance+Statements, ComponentLink26URL=http://sigma.octopart.com:80/15889575/rohs_statement/Yageo-CC0603KRX7R9BB104.pdf?src-supplier=Compliance+Statements, ComponentLink27Description=http://sigma.octopart.com:80/conflict_mineral_statement/Yageo-company-3.pdf?src-supplier=Compliance+Statements, ComponentLink27URL=http://sigma.octopart.com:80/conflict_mineral_statement/Yageo-company-3.pdf?src-supplier=Compliance+Statements, Country of Origin="Mainland China, Taiwan", Depth=800µm, Export Control Classification Number (ECCN) Code=EAR99, Halogen Free="Halogen Free", Harmonized Tariff Schedule (HTS) Code=8532.24.00.20, Height=800µm, Introduction Date=2005-08-18, Lead Free="Lead Free", Length=1.6mm, Lifecycle Status=Production, Manufacturer Part Number=CC0603KRX7R9BB104, Material=Ceramic, Mounting Technology="Surface Mount", Number of Terminals=2, Pins=2, Pricing="4000=0.00582, 8000=0.00559, 16000=0.00541, 32000=0.00522, 64000=0.00504 (USD)", Radiation Hardening=No, REACH SVHC=Yes, RoHS=Compliant, Schedule B="8532240020, 8532240020|8532240020, 8532240020|8532240020|8532240020, 8532240020|8532240020|8532240020|8532240020", Stock=6088000, Supplier=Avnet, Supplier Part Number=CC0603KRX7R9BB104, Termination=SMD/SMT, Thickness=889µm, Voltage Rating=50V, Voltage Rating (DC)=50V, Width=800µm
C3 C6 C8 C11 C14 C15 C17 C21 C22 C37 C41: library part CL10A106MA8NRNC, "25V 10uF X5R ±20% 0603 Multilayer Ceramic Capacitors MLCC - SMD/SMT ROHS", Case Code (Imperial)=0603, Case Code (Metric)=1608, Dielectric=X5R, Dielectric Material=Ceramic, JLCPCB Part Number=C96446, Manufacturer="Samsung Electro-Mechanics", Max Operating Temperature=85°C, Min Operating Temperature=-55°C, Tolerance=20%, Voltage Rating=25V, Case/Package=0603, Category="Ceramic Capacitors", China RoHS=Compliant, ComponentLink1Description=https://datasheet.octopart.com:443/CL10A106MA8NRNC-Samsung-Electro-Mechanics-datasheet-182019172.pdf?src-supplier=IHS, ComponentLink1URL=https://datasheet.octopart.com:443/CL10A106MA8NRNC-Samsung-Electro-Mechanics-datasheet-182019172.pdf?src-supplier=IHS, ComponentLink2Description=https://datasheet.octopart.com:443/CL10A106MA8NRNC-Samsung-Electro-Mechanics-datasheet-137745063.pdf?src-supplier=Future+Electronics, ComponentLink2URL=https://datasheet.octopart.com:443/CL10A106MA8NRNC-Samsung-Electro-Mechanics-datasheet-137745063.pdf?src-supplier=Future+Electronics, ComponentLink3Description=https://datasheet.octopart.com:443/CL10A106MA8NRNC-Samsung-Electro-Mechanics-datasheet-136031756.pdf?src-supplier=Future+Electronics, ComponentLink3URL=https://datasheet.octopart.com:443/CL10A106MA8NRNC-Samsung-Electro-Mechanics-datasheet-136031756.pdf?src-supplier=Future+Electronics, ComponentLink4Description=https://datasheet.octopart.com:443/CL10A106MA8NRNC-Samsung-Electro-Mechanics-datasheet-110226291.pdf?src-supplier=Future+Electronics, ComponentLink4URL=https://datasheet.octopart.com:443/CL10A106MA8NRNC-Samsung-Electro-Mechanics-datasheet-110226291.pdf?src-supplier=Future+Electronics, ComponentLink5Description=https://datasheet.octopart.com:443/CL10A106MA8NRNC-Samsung-Electro-Mechanics-datasheet-87580073.pdf?src-supplier=Future+Electronics, ComponentLink5URL=https://datasheet.octopart.com:443/CL10A106MA8NRNC-Samsung-Electro-Mechanics-datasheet-87580073.pdf?src-supplier=Future+Electronics, ComponentLink6Description=https://datasheet.octopart.com:443/CL10A106MA8NRNC-Samsung-Electro-Mechanics-datasheet-68300265.pdf?src-supplier=Future+Electronics, ComponentLink6URL=https://datasheet.octopart.com:443/CL10A106MA8NRNC-Samsung-Electro-Mechanics-datasheet-68300265.pdf?src-supplier=Future+Electronics, ComponentLink7Description=https://datasheet.octopart.com:443/CL10A106MA8NRNC-Samsung-datasheet-66660282.pdf?src-supplier=Future+Electronics, ComponentLink7URL=https://datasheet.octopart.com:443/CL10A106MA8NRNC-Samsung-datasheet-66660282.pdf?src-supplier=Future+Electronics, ComponentLink8Description=https://datasheet.octopart.com:443/CL10A106MA8NRNC-Samsung-datasheet-48647236.pdf?src-supplier=Future+Electronics, ComponentLink8URL=https://datasheet.octopart.com:443/CL10A106MA8NRNC-Samsung-datasheet-48647236.pdf?src-supplier=Future+Electronics, ComponentLink9Description=https://datasheet.octopart.com:443/CL10A106MA8NRNC-Samsung-datasheet-39118733.pdf?src-supplier=Future+Electronics, ComponentLink9URL=https://datasheet.octopart.com:443/CL10A106MA8NRNC-Samsung-datasheet-39118733.pdf?src-supplier=Future+Electronics, ComponentLink10Description=https://datasheet.octopart.com:443/CL10A106MA8NRNC-Samsung-Electro-Mechanics-datasheet-149156483.pdf?src-supplier=Future+Electronics, ComponentLink10URL=https://datasheet.octopart.com:443/CL10A106MA8NRNC-Samsung-Electro-Mechanics-datasheet-149156483.pdf?src-supplier=Future+Electronics, Contact Plating=Tin, Country of Origin="Mainland China, Philippines, South Korea", Export Control Classification Number (ECCN) Code=EAR99, Harmonized Tariff Schedule (HTS) Code=8532.24.00.20, Height=800µm, Introduction Date=2013-01-16, Lead Free="Lead Free", Length=1.6mm, Lifecycle Status=Production, Manufacturer Part Number=CL10A106MA8NRNC, Material=Ceramic, Mounting Technology="Surface Mount", Number of Terminals=2, Packaging="Tape & Reel (TR)", Pricing="4000=0.03585, 8000=0.03513, 16000=0.03443, 32000=0.03377, 64000=0.03313 (USD)", REACH SVHC=Yes, RoHS=Compliant, Schedule B="8532240020, 8532240020|8532240020|8532240020|8532240020|8532240020|8532240020|8532240020|8532240020|8532240020|8532240020|8532240020, 8532240020|8532240020|8532240020|8532240020|8532240020|8532240020|8532240020|8532240020|8532240020|8532240020|8532240020|8532240020, 8532240020|8532240020|8532240020|8532240020|8532240020|8532240020|8532240020|8532240020|8532240020|8532240020|8532240020|8532240020|8532240020", Stock=6860000, Supplier=Avnet, Supplier Part Number=CL10A106MA8NRNC, Termination=Wraparound, Thickness=889µm, Voltage Rating (DC)=25V, Width=800µm
C4: library part CC0603JRX7R9BB103, "Surface Mount Ceramic Multilayer Capacitor 0.01uF 5% X7R 50V 0603 Paper T/R", Case Code (Imperial)=0603, Case Code (Metric)=1608, Dielectric=X7R, Dielectric Material=Ceramic, JLCPCB Part Number=C115056, Manufacturer="Yageo Group", Max Operating Temperature=125°C, Min Operating Temperature=-55°C, Tolerance=5%, Voltage Rating=50V, Case/Package=0603, Category="Ceramic Capacitors", China RoHS=Compliant, ComponentLink1Description=https://datasheet.octopart.com:443/CC0603JRX7R9BB103-Yageo-datasheet-177165144.pdf?src-supplier=IHS, ComponentLink1URL=https://datasheet.octopart.com:443/CC0603JRX7R9BB103-Yageo-datasheet-177165144.pdf?src-supplier=IHS, ComponentLink2Description=https://datasheet.octopart.com/CC0603JRX7R9BB103-Yageo-datasheet-10883670.pdf, ComponentLink2URL=https://datasheet.octopart.com/CC0603JRX7R9BB103-Yageo-datasheet-10883670.pdf, ComponentLink3Description=https://datasheet.octopart.com:443/CC0603JRX7R9BB103-Yageo-datasheet-147453679.pdf?src-supplier=Newark, ComponentLink3URL=https://datasheet.octopart.com:443/CC0603JRX7R9BB103-Yageo-datasheet-147453679.pdf?src-supplier=Newark, ComponentLink4Description=https://datasheet.octopart.com:443/CC0603JRX7R9BB103-Yageo-datasheet-140260305.pdf?src-supplier=Farnell, ComponentLink4URL=https://datasheet.octopart.com:443/CC0603JRX7R9BB103-Yageo-datasheet-140260305.pdf?src-supplier=Farnell, ComponentLink5Description=https://datasheet.octopart.com:443/CC0603JRX7R9BB103-Yageo-datasheet-181968368.pdf?src-supplier=Farnell, ComponentLink5URL=https://datasheet.octopart.com:443/CC0603JRX7R9BB103-Yageo-datasheet-181968368.pdf?src-supplier=Farnell, ComponentLink6Description=https://datasheet.octopart.com:443/CC0603JRX7R9BB103-Yageo-datasheet-62336348.pdf?src-supplier=element14+APAC, ComponentLink6URL=https://datasheet.octopart.com:443/CC0603JRX7R9BB103-Yageo-datasheet-62336348.pdf?src-supplier=element14+APAC, ComponentLink7Description=https://datasheet.octopart.com:443/CC0603JRX7R9BB103-Yageo-datasheet-499490.pdf?src-supplier=element14, ComponentLink7URL=https://datasheet.octopart.com:443/CC0603JRX7R9BB103-Yageo-datasheet-499490.pdf?src-supplier=element14, ComponentLink8Description=https://datasheet.octopart.com:443/CC0603JRX7R9BB103-Yageo-datasheet-8701427.pdf?src-supplier=element14, ComponentLink8URL=https://datasheet.octopart.com:443/CC0603JRX7R9BB103-Yageo-datasheet-8701427.pdf?src-supplier=element14, ComponentLink9Description=https://datasheet.octopart.com:443/CC0603JRX7R9BB103-Yageo-datasheet-5301394.pdf?src-supplier=element14, ComponentLink9URL=https://datasheet.octopart.com:443/CC0603JRX7R9BB103-Yageo-datasheet-5301394.pdf?src-supplier=element14, ComponentLink10Description=https://datasheet.octopart.com:443/CC0603JRX7R9BB103-Yageo-datasheet-166511530.pdf?src-supplier=Future+Electronics, ComponentLink10URL=https://datasheet.octopart.com:443/CC0603JRX7R9BB103-Yageo-datasheet-166511530.pdf?src-supplier=Future+Electronics, ComponentLink11Description=https://datasheet.octopart.com:443/CC0603JRX7R9BB103-Yageo-datasheet-137700082.pdf?src-supplier=Future+Electronics, ComponentLink11URL=https://datasheet.octopart.com:443/CC0603JRX7R9BB103-Yageo-datasheet-137700082.pdf?src-supplier=Future+Electronics, ComponentLink12Description=https://datasheet.octopart.com:443/CC0603JRX7R9BB103-Yageo-datasheet-137700084.pdf?src-supplier=Future+Electronics, ComponentLink12URL=https://datasheet.octopart.com:443/CC0603JRX7R9BB103-Yageo-datasheet-137700084.pdf?src-supplier=Future+Electronics, ComponentLink13Description=https://datasheet.octopart.com:443/CC0603JRX7R9BB103-Yageo-datasheet-27626582.pdf?src-supplier=Future+Electronics, ComponentLink13URL=https://datasheet.octopart.com:443/CC0603JRX7R9BB103-Yageo-datasheet-27626582.pdf?src-supplier=Future+Electronics, ComponentLink14Description=https://datasheet.octopart.com:443/CC0603JRX7R9BB103-Yageo-datasheet-15895757.pdf?src-supplier=Future+Electronics, ComponentLink14URL=https://datasheet.octopart.com:443/CC0603JRX7R9BB103-Yageo-datasheet-15895757.pdf?src-supplier=Future+Electronics, ComponentLink15Description=https://datasheet.octopart.com:443/CC0603JRX7R9BB103-Yageo-datasheet-12526321.pdf?src-supplier=Future+Electronics, ComponentLink15URL=https://datasheet.octopart.com:443/CC0603JRX7R9BB103-Yageo-datasheet-12526321.pdf?src-supplier=Future+Electronics, ComponentLink16Description=https://datasheet.octopart.com:443/CC0603JRX7R9BB103-Yageo-Group-datasheet-165992755.pdf?src-supplier=ODG+(Origin+Data+Global), ComponentLink16URL=https://datasheet.octopart.com:443/CC0603JRX7R9BB103-Yageo-Group-datasheet-165992755.pdf?src-supplier=ODG+(Origin+Data+Global), ComponentLink17Description=https://datasheet.octopart.com:443/CC0603JRX7R9BB103-Yageo-datasheet-151948686.pdf?src-supplier=TME, ComponentLink17URL=https://datasheet.octopart.com:443/CC0603JRX7R9BB103-Yageo-datasheet-151948686.pdf?src-supplier=TME, ComponentLink18Description=http://sigma.octopart.com:80/conflict_mineral_statement/Yageo-company-3.pdf?src-supplier=Compliance+Statements, ComponentLink18URL=http://sigma.octopart.com:80/conflict_mineral_statement/Yageo-company-3.pdf?src-supplier=Compliance+Statements, ComponentLink19Description=http://sigma.octopart.com:80/rohs_statement/Yageo-company-2.pdf?src-supplier=Compliance+Statements, ComponentLink19URL=http://sigma.octopart.com:80/rohs_statement/Yageo-company-2.pdf?src-supplier=Compliance+Statements, Composition=Ceramic, Depth=800µm, Halogen Free="Halogen Free", Height=800µm, Lead Free="Lead Free", Length=1.6mm, Lifecycle Status=Production, Manufacturer Part Number=CC0603JRX7R9BB103, Mounting Technology="Surface Mount", Number of Terminals=2, Pins=2, Pricing="10=0.03, 20=0.029, 30=0.028, 50=0.027, 100=0.026, 250=0.023, 500=0.019, 1000=0.017 (USD)", Radiation Hardening=No, REACH SVHC=Unaffected, RoHS=Compliant, Schedule B="8532240020, 8532240020|8532240020, 8532240020|8532240020|8532240020, 8532240020|8532240020|8532240020|8532240020", Stock=32119, Supplier=Newark, Supplier Part Number=CC0603JRX7R9BB103, Termination=SMD/SMT, Thickness=889µm, Voltage Rating (DC)=50V, Width=800µm
C5: library part RVT1E101M0607, "Capacitor Polarised", JLCPCB Part Number=C72477, Manufacturer_Name=ROQANG, Datasheet Link=https://jlcpcb.com/partdetail/ROQANG-RVT1E101M0607/C72477, Height=8mm, Manufacturer_Part_Number=RVT1E101M0607
C10: library part CL10A475KA8NQNC, "25V 4.7uF X5R 卤10% 0603 Multilayer Ceramic Capacitors MLCC - SMD/SMT ROHS", Case Code (Imperial)=0603, Case Code (Metric)=1608, Dielectric=X5R, Dielectric Material=Ceramic, JLCPCB Part Number=C69335, Manufacturer="Samsung Electro-Mechanics", Max Operating Temperature=85°C, Min Operating Temperature=-55°C, Tolerance=10%, Voltage Rating=25V, Case/Package=0603, Category="Ceramic Capacitors", China RoHS=Compliant, ComponentLink1Description=https://datasheet.octopart.com:443/CL10A475KA8NQNC-Samsung-Electro-Mechanics-datasheet-182019420.pdf?src-supplier=IHS, ComponentLink1URL=https://datasheet.octopart.com:443/CL10A475KA8NQNC-Samsung-Electro-Mechanics-datasheet-182019420.pdf?src-supplier=IHS, ComponentLink2Description=https://datasheet.octopart.com:443/CL10A475KA8NQNC-Samsung-Electro-Mechanics-datasheet-136031786.pdf?src-supplier=Samsung+SCT, ComponentLink2URL=https://datasheet.octopart.com:443/CL10A475KA8NQNC-Samsung-Electro-Mechanics-datasheet-136031786.pdf?src-supplier=Samsung+SCT, ComponentLink3Description=https://datasheet.octopart.com:443/CL10A475KA8NQNC-Samsung-Electro-Mechanics-datasheet-133510619.pdf?src-supplier=Future+Electronics, ComponentLink3URL=https://datasheet.octopart.com:443/CL10A475KA8NQNC-Samsung-Electro-Mechanics-datasheet-133510619.pdf?src-supplier=Future+Electronics, ComponentLink4Description=https://datasheet.octopart.com:443/CL10A475KA8NQNC-Samsung-Electro-Mechanics-datasheet-68304637.pdf?src-supplier=Future+Electronics, ComponentLink4URL=https://datasheet.octopart.com:443/CL10A475KA8NQNC-Samsung-Electro-Mechanics-datasheet-68304637.pdf?src-supplier=Future+Electronics, ComponentLink5Description=https://datasheet.octopart.com:443/CL10A475KA8NQNC-Samsung-datasheet-66660282.pdf?src-supplier=Future+Electronics, ComponentLink5URL=https://datasheet.octopart.com:443/CL10A475KA8NQNC-Samsung-datasheet-66660282.pdf?src-supplier=Future+Electronics, ComponentLink6Description=https://datasheet.octopart.com:443/CL10A475KA8NQNC-Samsung-datasheet-42901174.pdf?src-supplier=Future+Electronics, ComponentLink6URL=https://datasheet.octopart.com:443/CL10A475KA8NQNC-Samsung-datasheet-42901174.pdf?src-supplier=Future+Electronics, ComponentLink7Description=https://datasheet.octopart.com:443/CL10A475KA8NQNC-Samsung-Electro-Mechanics-datasheet-100454038.pdf?src-supplier=Future+Electronics, ComponentLink7URL=https://datasheet.octopart.com:443/CL10A475KA8NQNC-Samsung-Electro-Mechanics-datasheet-100454038.pdf?src-supplier=Future+Electronics, ComponentLink8Description=https://datasheet.octopart.com:443/CL10A475KA8NQNC-Samsung-Electro-Mechanics-datasheet-149158805.pdf?src-supplier=Future+Electronics, ComponentLink8URL=https://datasheet.octopart.com:443/CL10A475KA8NQNC-Samsung-Electro-Mechanics-datasheet-149158805.pdf?src-supplier=Future+Electronics, Contact Plating=Tin, Country of Origin="Mainland China, Philippines, South Korea", Depth=800µm, Export Control Classification Number (ECCN) Code=EAR99, Harmonized Tariff Schedule (HTS) Code=8532.24.00.20, Height=950µm, Introduction Date=2010-04-05, Lead Free="Lead Free", Length=1.6mm, Lifecycle Status=Production, Manufacturer Part Number=CL10A475KA8NQNC, Material=Ceramic, Mounting Technology="Surface Mount", Number of Terminals=2, Packaging="Tape & Reel (TR)", Pricing="4000=0.365 (USD)", REACH SVHC=Unaffected, RoHS=Compliant, Schedule B="8532240020, 8532240020|8532240020, 8532240020|8532240020|8532240020, 8532240020|8532240020|8532240020|8532240020", Stock=708000, Supplier="Future Electronics", Supplier Part Number=CL10A475KA8NQNC, Termination=Wraparound, Thickness=889µm, Voltage Rating (DC)=25V, Width=800µm
C19 C39: library part CC0603KRX7R9BB682, "Surface Mount Ceramic Multilayer Capacitor 0.0068uF 10% X7R 50V 0603 Paper T/R", Case Code (Imperial)=0603, Case Code (Metric)=1608, Dielectric=X7R, Dielectric Material=Ceramic, Insulation Resistance=100GΩ, JLCPCB Part Number=C107097, Manufacturer="Yageo Group", Max Operating Temperature=125°C, Min Operating Temperature=-55°C, Tolerance=10%, Voltage=50V, Case/Package=0603, Category="Ceramic Capacitors", China RoHS=Compliant, ComponentLink1Description=https://datasheet.octopart.com:443/CC0603KRX7R9BB682-Yageo-datasheet-177165144.pdf?src-supplier=IHS, ComponentLink1URL=https://datasheet.octopart.com:443/CC0603KRX7R9BB682-Yageo-datasheet-177165144.pdf?src-supplier=IHS, ComponentLink2Description=https://datasheet.octopart.com:443/CC0603KRX7R9BB682-Yageo-datasheet-82288757.pdf?src-supplier=Upverter, ComponentLink2URL=https://datasheet.octopart.com:443/CC0603KRX7R9BB682-Yageo-datasheet-82288757.pdf?src-supplier=Upverter, ComponentLink3Description=https://datasheet.octopart.com/CC0603KRX7R9BB682-Yageo-datasheet-10883670.pdf, ComponentLink3URL=https://datasheet.octopart.com/CC0603KRX7R9BB682-Yageo-datasheet-10883670.pdf, ComponentLink4Description=https://datasheet.octopart.com:443/CC0603KRX7R9BB682-Yageo-datasheet-147453679.pdf?src-supplier=Farnell, ComponentLink4URL=https://datasheet.octopart.com:443/CC0603KRX7R9BB682-Yageo-datasheet-147453679.pdf?src-supplier=Farnell, ComponentLink5Description=https://datasheet.octopart.com:443/CC0603KRX7R9BB682-Yageo-Group-datasheet-188689702.pdf?src-supplier=Farnell, ComponentLink5URL=https://datasheet.octopart.com:443/CC0603KRX7R9BB682-Yageo-Group-datasheet-188689702.pdf?src-supplier=Farnell, ComponentLink6Description=https://datasheet.octopart.com:443/CC0603KRX7R9BB682-Yageo-datasheet-500777.pdf?src-supplier=Farnell, ComponentLink6URL=https://datasheet.octopart.com:443/CC0603KRX7R9BB682-Yageo-datasheet-500777.pdf?src-supplier=Farnell, ComponentLink7Description=https://datasheet.octopart.com:443/CC0603KRX7R9BB682-Yageo-datasheet-5301394.pdf?src-supplier=Newark, ComponentLink7URL=https://datasheet.octopart.com:443/CC0603KRX7R9BB682-Yageo-datasheet-5301394.pdf?src-supplier=Newark, ComponentLink8Description=https://datasheet.octopart.com:443/CC0603KRX7R9BB682-Yageo-datasheet-62336348.pdf?src-supplier=element14+APAC, ComponentLink8URL=https://datasheet.octopart.com:443/CC0603KRX7R9BB682-Yageo-datasheet-62336348.pdf?src-supplier=element14+APAC, ComponentLink9Description=https://datasheet.octopart.com:443/CC0603KRX7R9BB682-Yageo-datasheet-151948686.pdf?src-supplier=TME, ComponentLink9URL=https://datasheet.octopart.com:443/CC0603KRX7R9BB682-Yageo-datasheet-151948686.pdf?src-supplier=TME, ComponentLink10Description=https://datasheet.octopart.com:443/CC0603KRX7R9BB682-Yageo-datasheet-499490.pdf?src-supplier=element14, ComponentLink10URL=https://datasheet.octopart.com:443/CC0603KRX7R9BB682-Yageo-datasheet-499490.pdf?src-supplier=element14, ComponentLink11Description=https://datasheet.octopart.com:443/CC0603KRX7R9BB682-Yageo-datasheet-8701427.pdf?src-supplier=element14, ComponentLink11URL=https://datasheet.octopart.com:443/CC0603KRX7R9BB682-Yageo-datasheet-8701427.pdf?src-supplier=element14, ComponentLink12Description=https://datasheet.octopart.com:443/CC0603KRX7R9BB682-Yageo-Group-datasheet-184163374.pdf?src-supplier=LCSC, ComponentLink12URL=https://datasheet.octopart.com:443/CC0603KRX7R9BB682-Yageo-Group-datasheet-184163374.pdf?src-supplier=LCSC, ComponentLink13Description=https://datasheet.octopart.com:443/CC0603KRX7R9BB682-Yageo-datasheet-166511530.pdf?src-supplier=Future+Electronics, ComponentLink13URL=https://datasheet.octopart.com:443/CC0603KRX7R9BB682-Yageo-datasheet-166511530.pdf?src-supplier=Future+Electronics, ComponentLink14Description=https://datasheet.octopart.com:443/CC0603KRX7R9BB682-Yageo-datasheet-137700082.pdf?src-supplier=Future+Electronics, ComponentLink14URL=https://datasheet.octopart.com:443/CC0603KRX7R9BB682-Yageo-datasheet-137700082.pdf?src-supplier=Future+Electronics, ComponentLink15Description=https://datasheet.octopart.com:443/CC0603KRX7R9BB682-Yageo-datasheet-137700084.pdf?src-supplier=Future+Electronics, ComponentLink15URL=https://datasheet.octopart.com:443/CC0603KRX7R9BB682-Yageo-datasheet-137700084.pdf?src-supplier=Future+Electronics, ComponentLink16Description=https://datasheet.octopart.com:443/CC0603KRX7R9BB682-Yageo-datasheet-27626582.pdf?src-supplier=Future+Electronics, ComponentLink16URL=https://datasheet.octopart.com:443/CC0603KRX7R9BB682-Yageo-datasheet-27626582.pdf?src-supplier=Future+Electronics, ComponentLink17Description=https://datasheet.octopart.com:443/CC0603KRX7R9BB682-Yageo-datasheet-15895757.pdf?src-supplier=Future+Electronics, ComponentLink17URL=https://datasheet.octopart.com:443/CC0603KRX7R9BB682-Yageo-datasheet-15895757.pdf?src-supplier=Future+Electronics, ComponentLink18Description=https://datasheet.octopart.com:443/CC0603KRX7R9BB682-Yageo-datasheet-12526321.pdf?src-supplier=Future+Electronics, ComponentLink18URL=https://datasheet.octopart.com:443/CC0603KRX7R9BB682-Yageo-datasheet-12526321.pdf?src-supplier=Future+Electronics, ComponentLink19Description=https://datasheet.octopart.com:443/CC0603KRX7R9BB682-Yageo-datasheet-8324192.pdf?src-supplier=Future+Electronics, ComponentLink19URL=https://datasheet.octopart.com:443/CC0603KRX7R9BB682-Yageo-datasheet-8324192.pdf?src-supplier=Future+Electronics, ComponentLink20Description=https://datasheet.octopart.com:443/CC0603KRX7R9BB682-Yageo-datasheet-178019221.pdf?src-supplier=Burklin+Elektronik, ComponentLink20URL=https://datasheet.octopart.com:443/CC0603KRX7R9BB682-Yageo-datasheet-178019221.pdf?src-supplier=Burklin+Elektronik, ComponentLink21Description=https://datasheet.octopart.com:443/CC0603KRX7R9BB682-Yageo-Group-datasheet-165992755.pdf?src-supplier=ODG+(Origin+Data+Global), ComponentLink21URL=https://datasheet.octopart.com:443/CC0603KRX7R9BB682-Yageo-Group-datasheet-165992755.pdf?src-supplier=ODG+(Origin+Data+Global), ComponentLink22Description=https://datasheet.octopart.com:443/CC0603KRX7R9BB682-Yageo-datasheet-140260305.pdf?src-supplier=SOS+electronic, ComponentLink22URL=https://datasheet.octopart.com:443/CC0603KRX7R9BB682-Yageo-datasheet-140260305.pdf?src-supplier=SOS+electronic, ComponentLink23Description=https://datasheet.octopart.com:443/CC0603KRX7R9BB682-Yageo-datasheet-118396.pdf?src-supplier=DigiKey, ComponentLink23URL=https://datasheet.octopart.com:443/CC0603KRX7R9BB682-Yageo-datasheet-118396.pdf?src-supplier=DigiKey, ComponentLink24Description=http://sigma.octopart.com:80/conflict_mineral_statement/Yageo-company-3.pdf?src-supplier=Compliance+Statements, ComponentLink24URL=http://sigma.octopart.com:80/conflict_mineral_statement/Yageo-company-3.pdf?src-supplier=Compliance+Statements, ComponentLink25Description=http://sigma.octopart.com:80/rohs_statement/Yageo-company-2.pdf?src-supplier=Compliance+Statements, ComponentLink25URL=http://sigma.octopart.com:80/rohs_statement/Yageo-company-2.pdf?src-supplier=Compliance+Statements, Composition=Ceramic, Depth=800µm, Halogen Free="Halogen Free", Height=800µm, Lead Free="Lead Free", Length=1.6mm, Lifecycle Status=Production, Manufacturer Part Number=CC0603KRX7R9BB682, Material=Ceramic, Mounting Technology="Surface Mount", Number of Terminals=2, Pins=2, Pricing="4000=0.00678 (USD)", Radiation Hardening=No, REACH SVHC=Unaffected, RoHS=Compliant, Schedule B="8532240020, 8532240020|8532240020, 8532240020|8532240020|8532240020, 8532240020|8532240020|8532240020|8532240020", Stock=56000, Supplier=Avnet, Supplier Part Number=CC0603KRX7R9BB682, Termination=SMD/SMT, Thickness=889µm, Voltage Rating=50V, Voltage Rating (AC)=50V, Voltage Rating (DC)=50V, Width=800µm